# Altium PCB SB0037A.PcbDoc (part 1 of 7)
Units mil, origin at the board's own origin, x right, y up, seen from the top; angles counter-clockwise.
Board outline 2872.5 x 4560 mil, 6 copper layers (Top Layer, L2, L3, L4, L5, Bottom Layer), stack 30.268 mil thick; 282 components, 292 nets, 1320 pads, 687 vias.
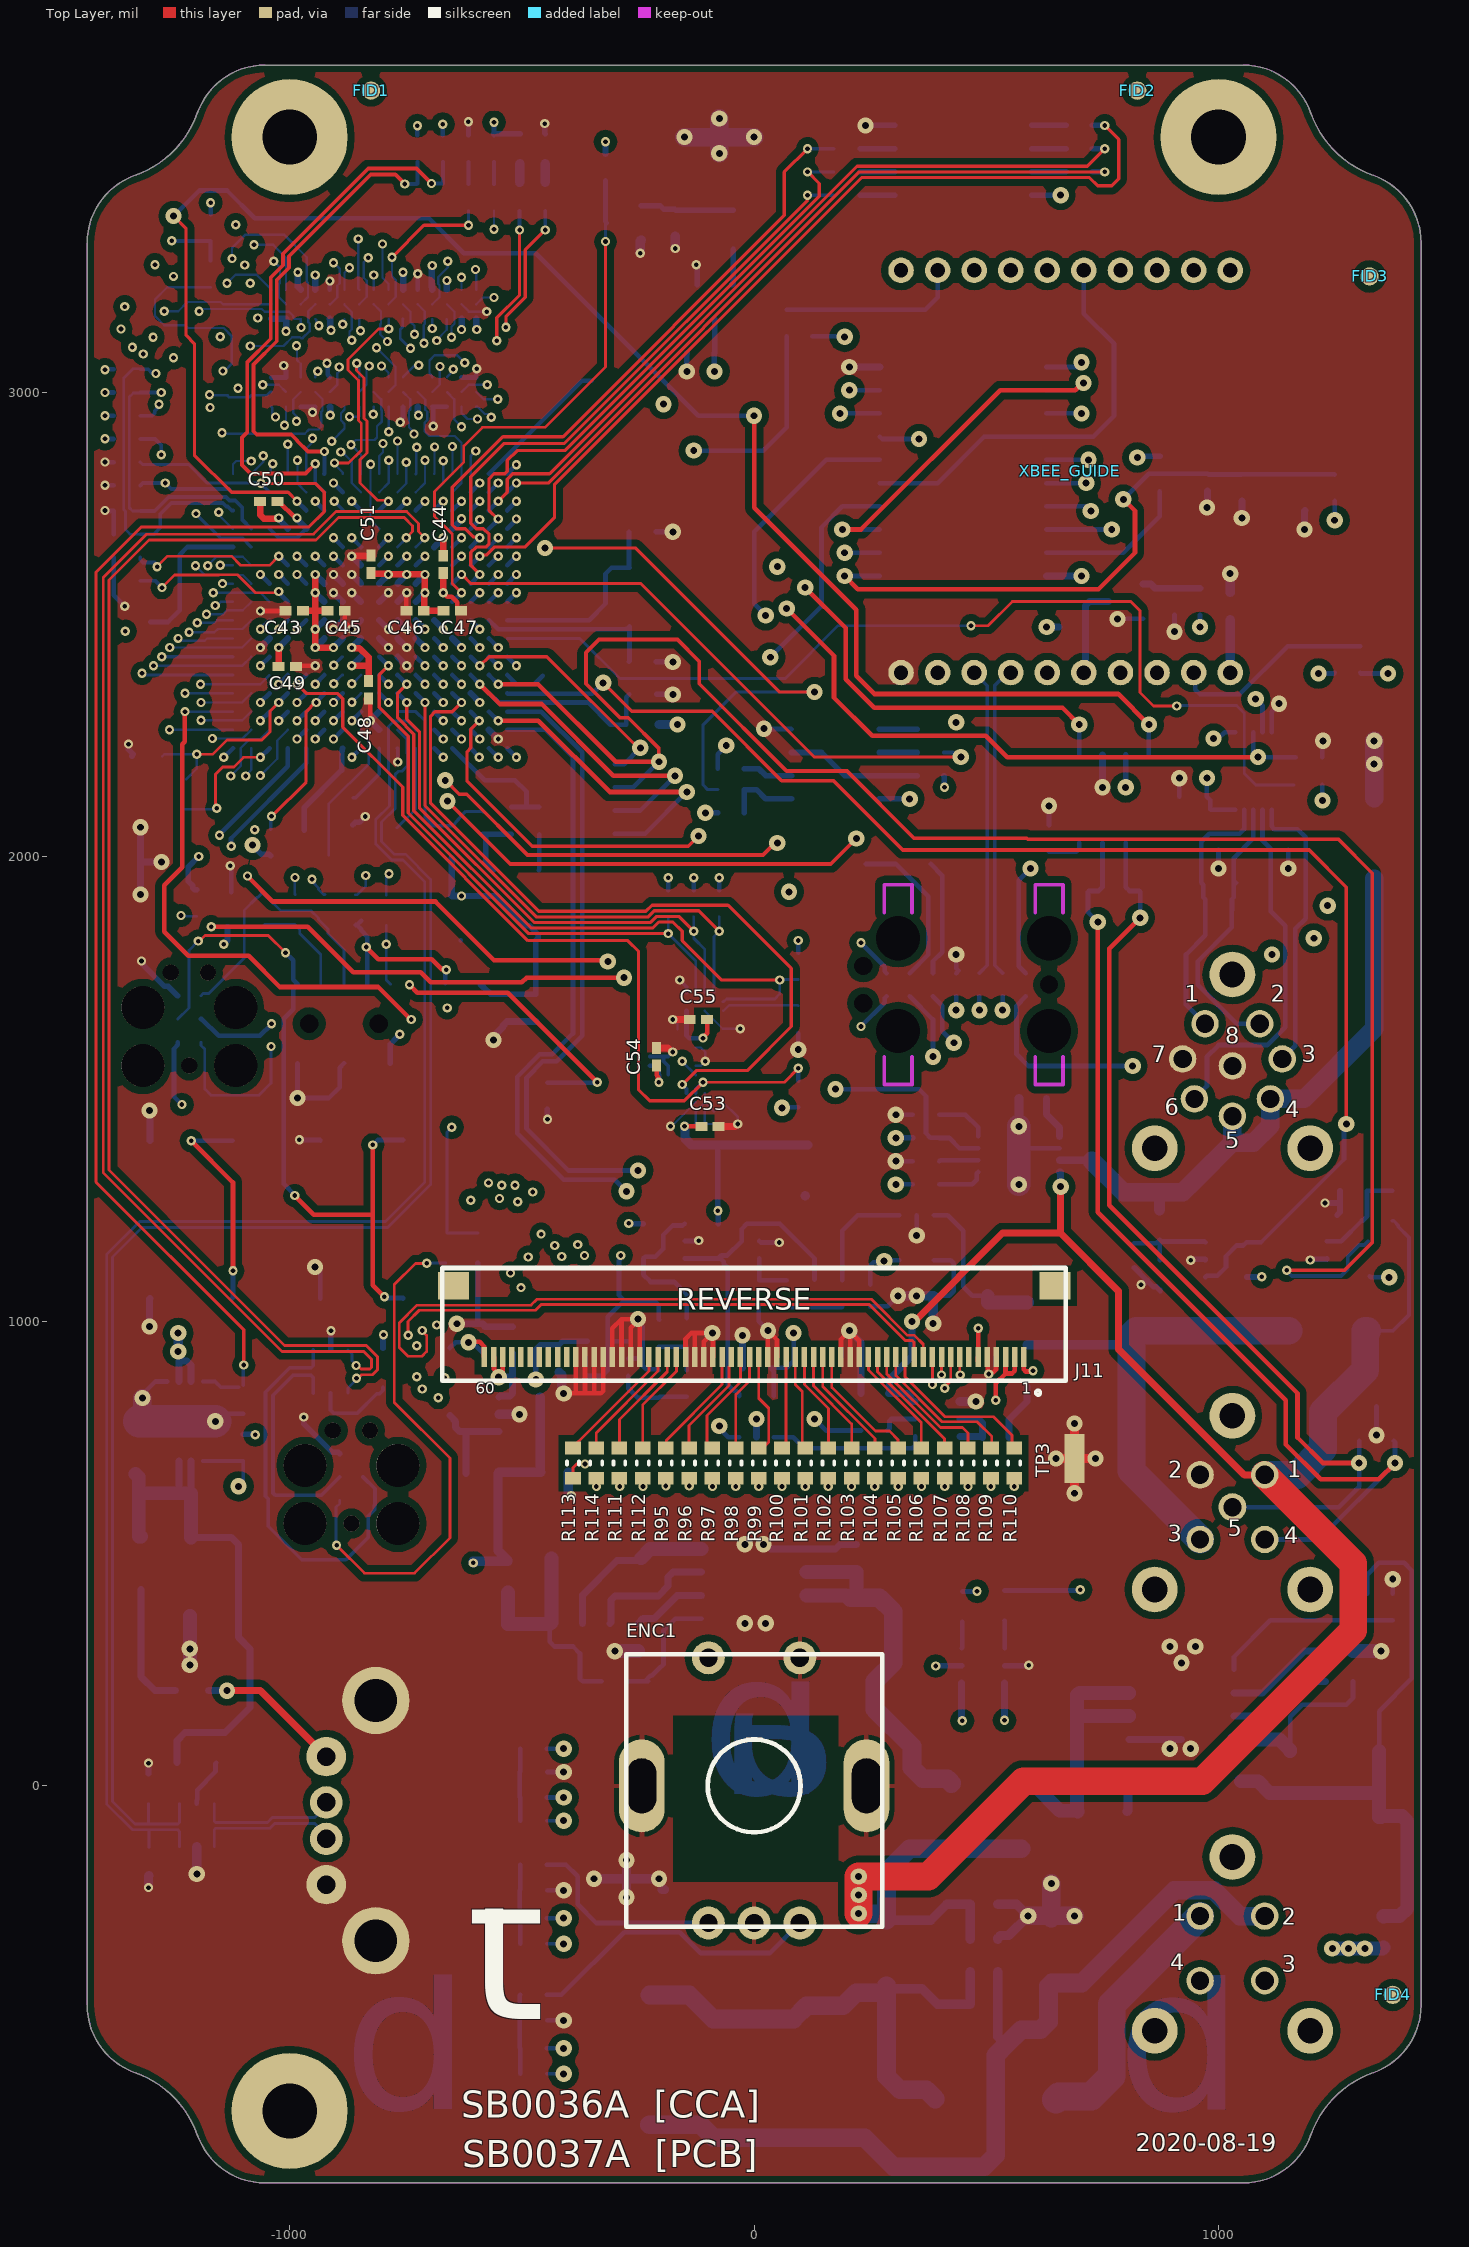
[diagram p0: Top Layer view]
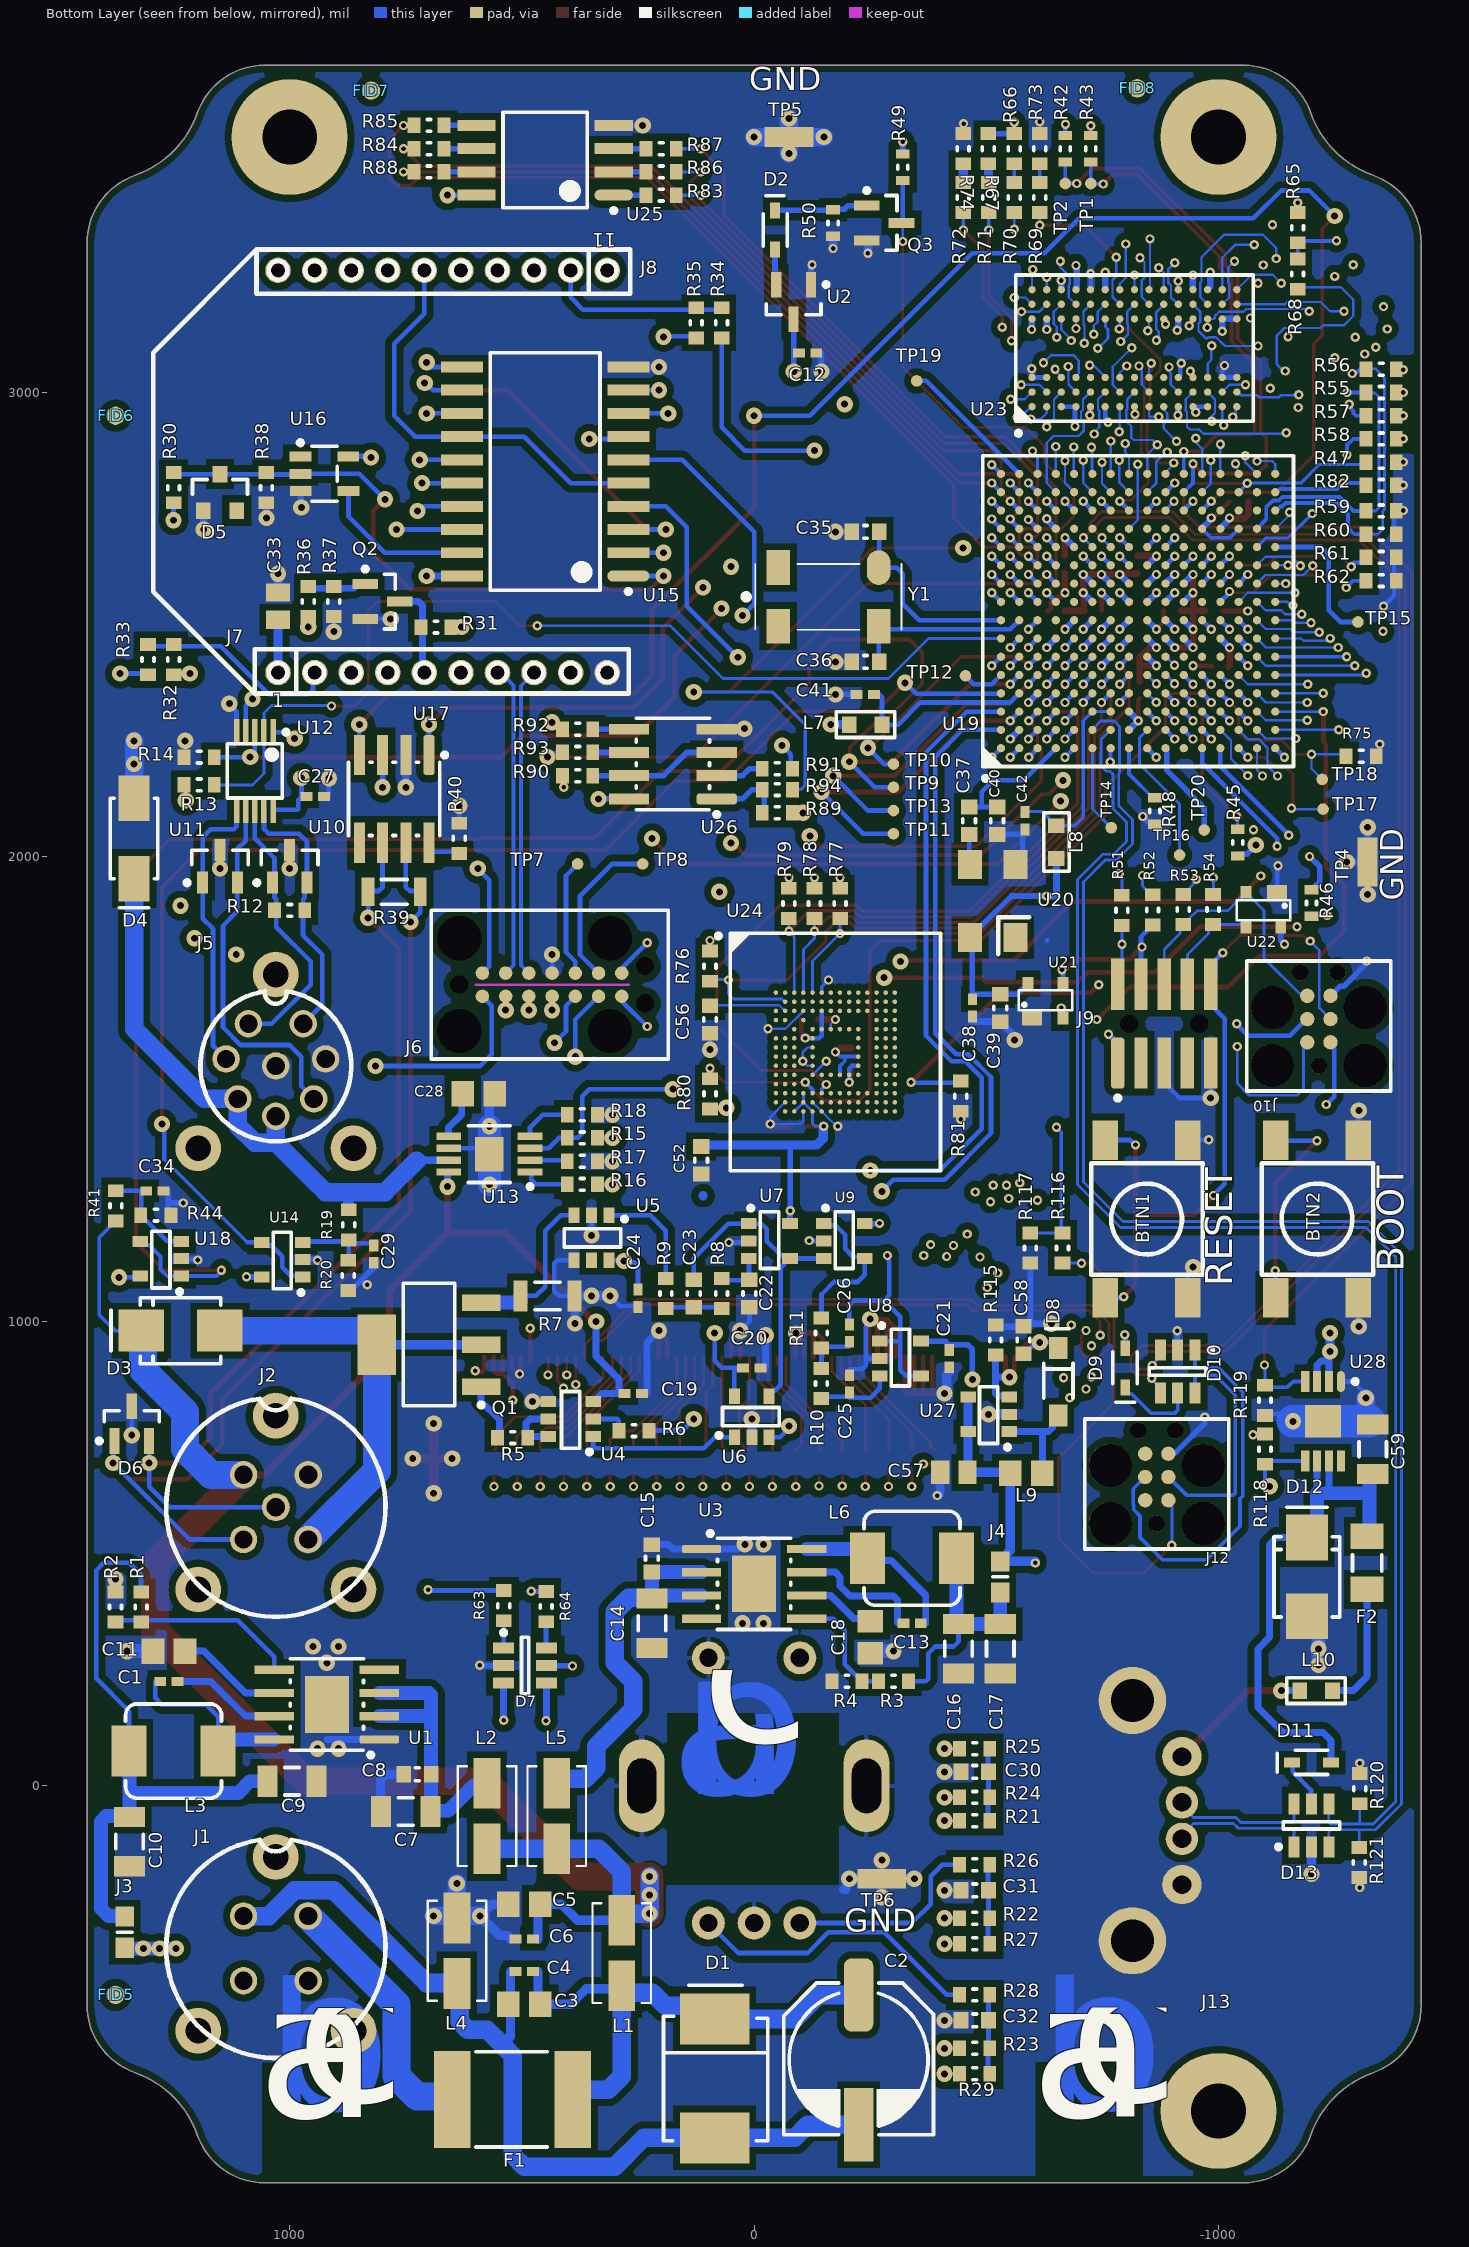
[diagram p1: Bottom Layer view, seen from below]
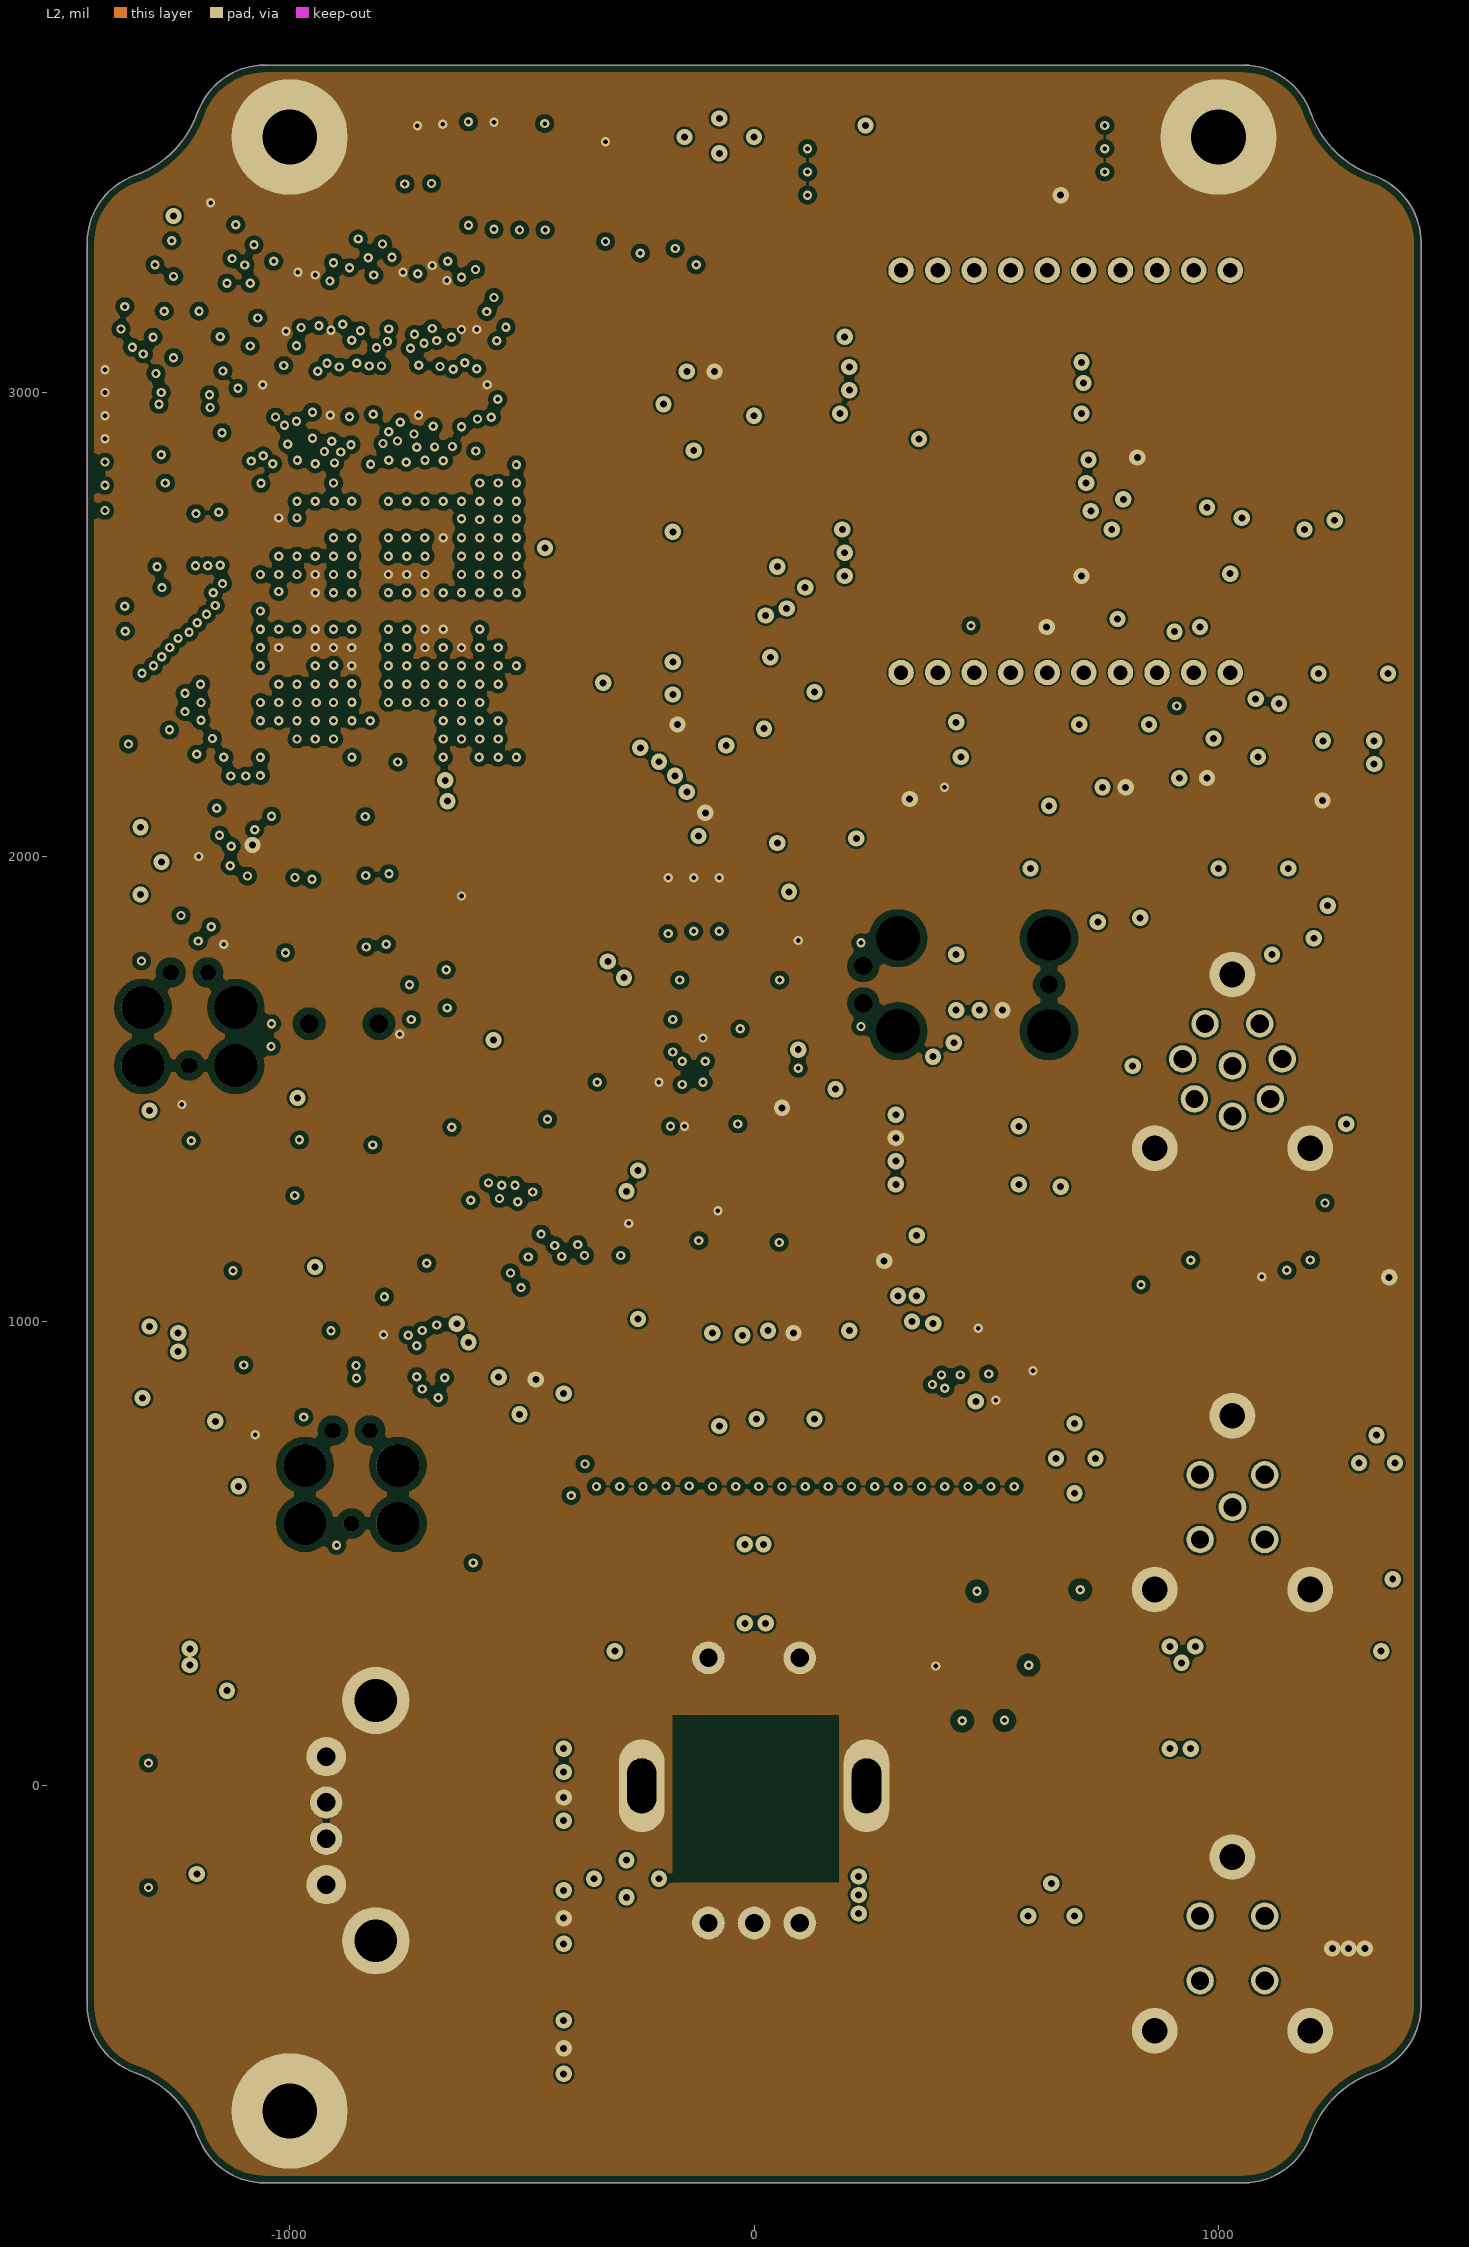
[diagram p2: L2]
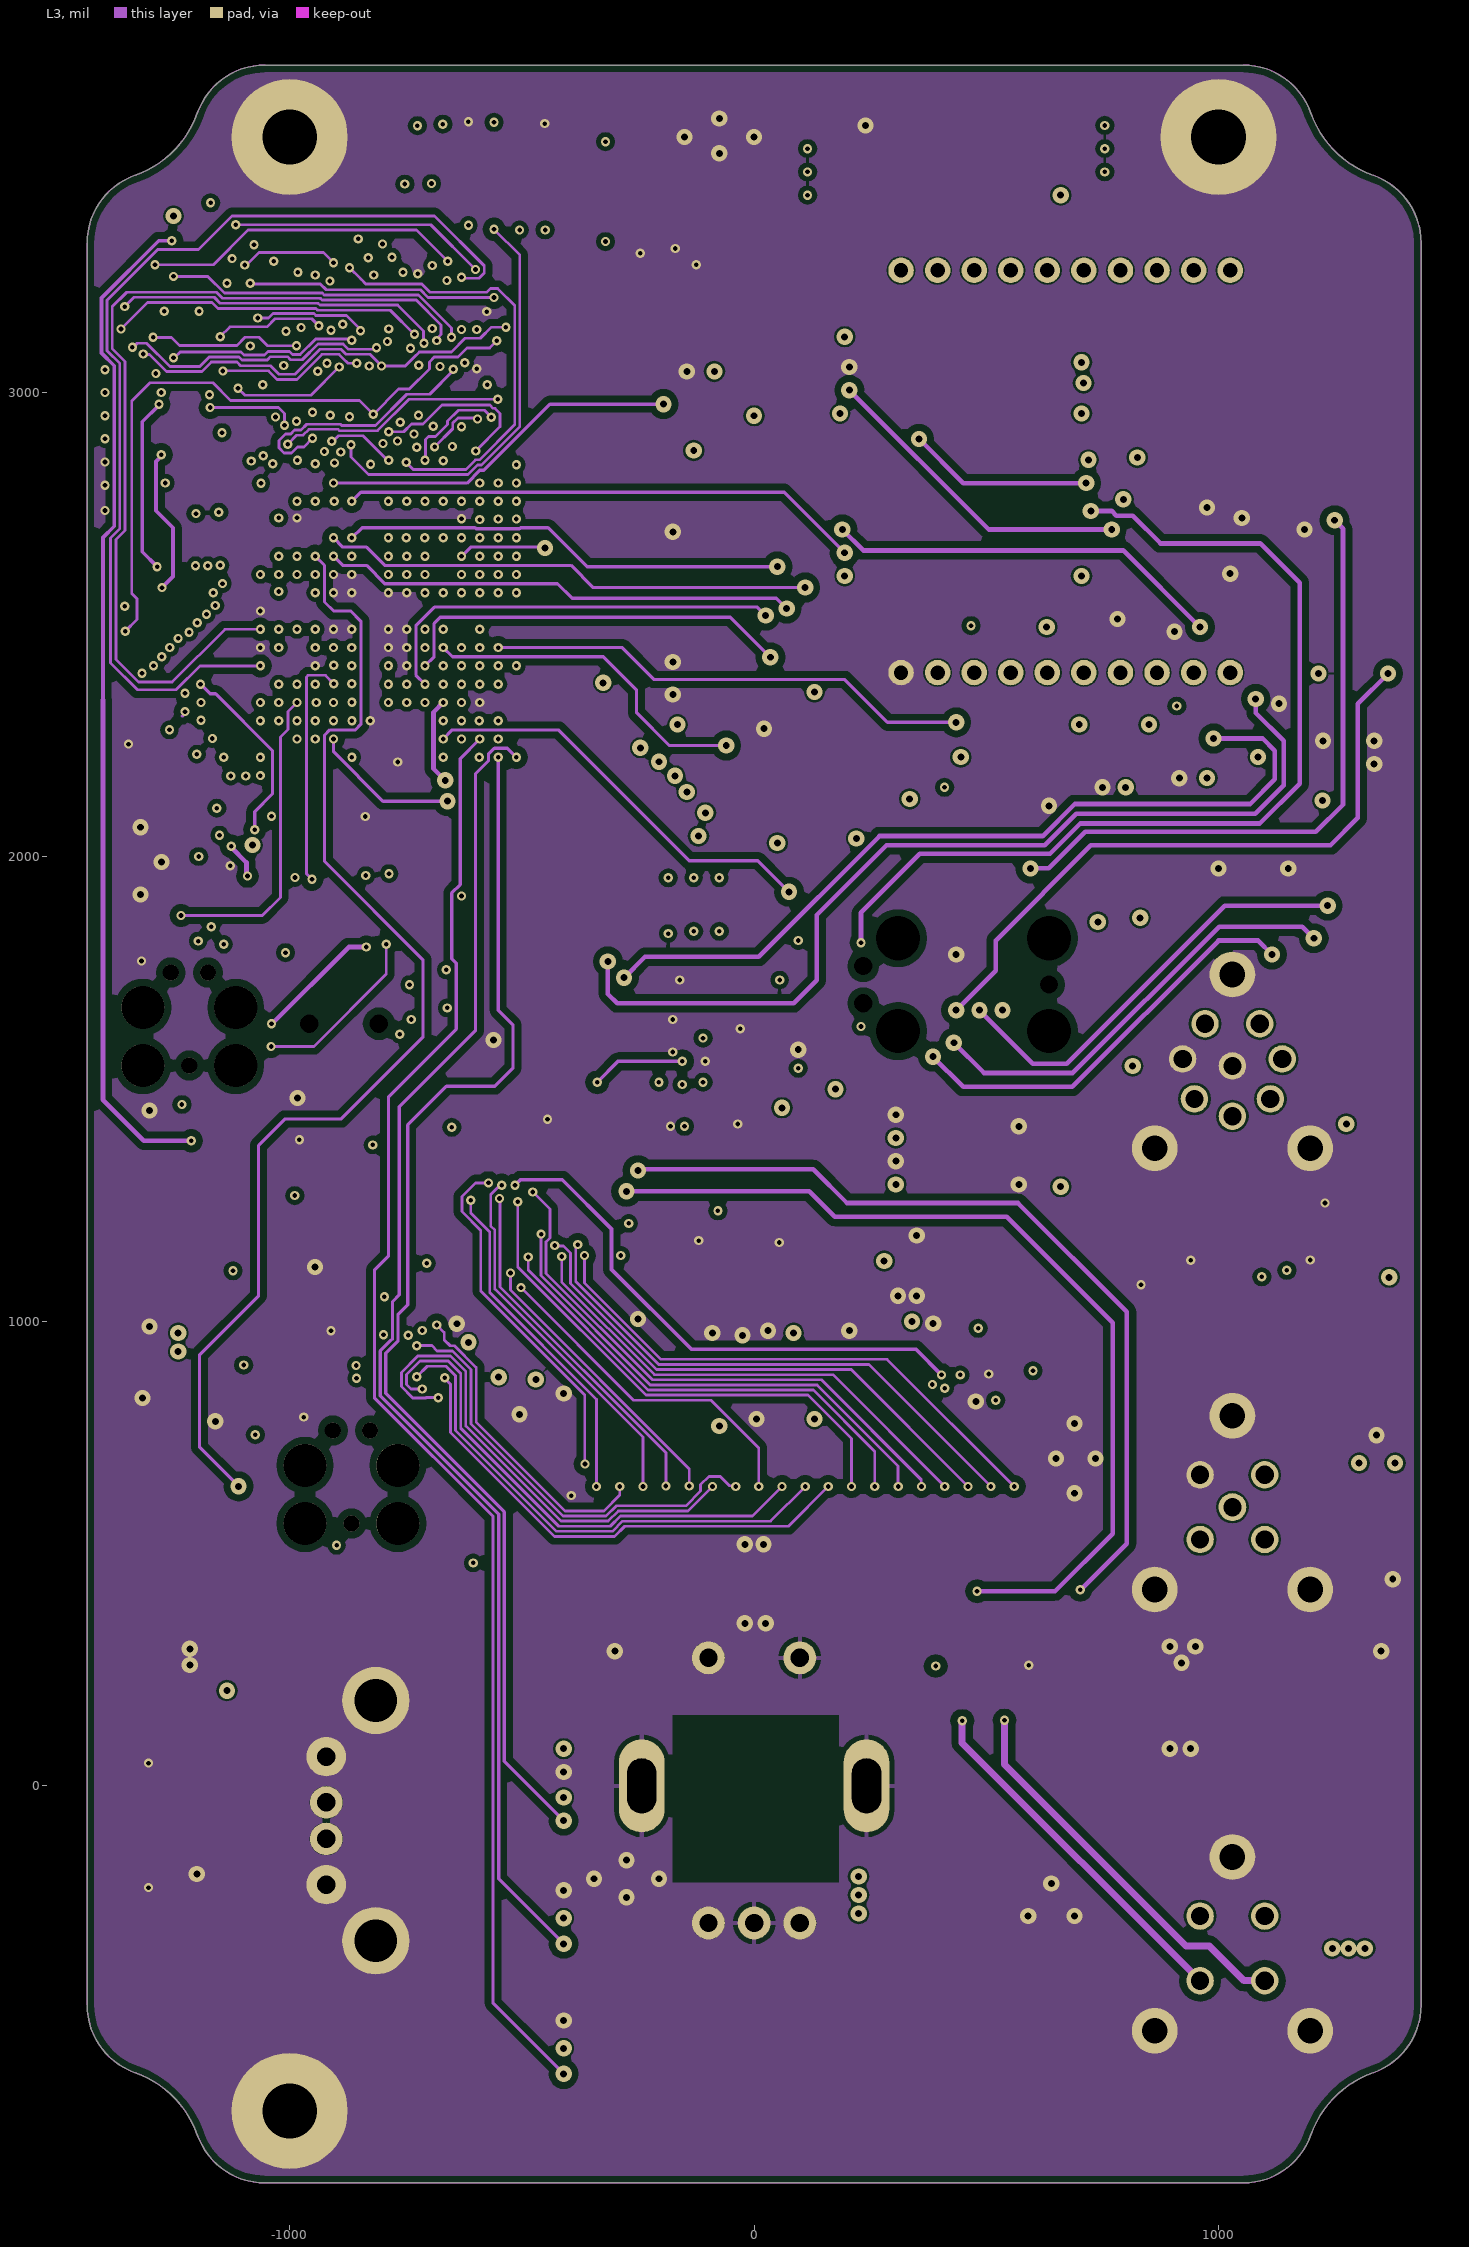
[diagram p3: L3]
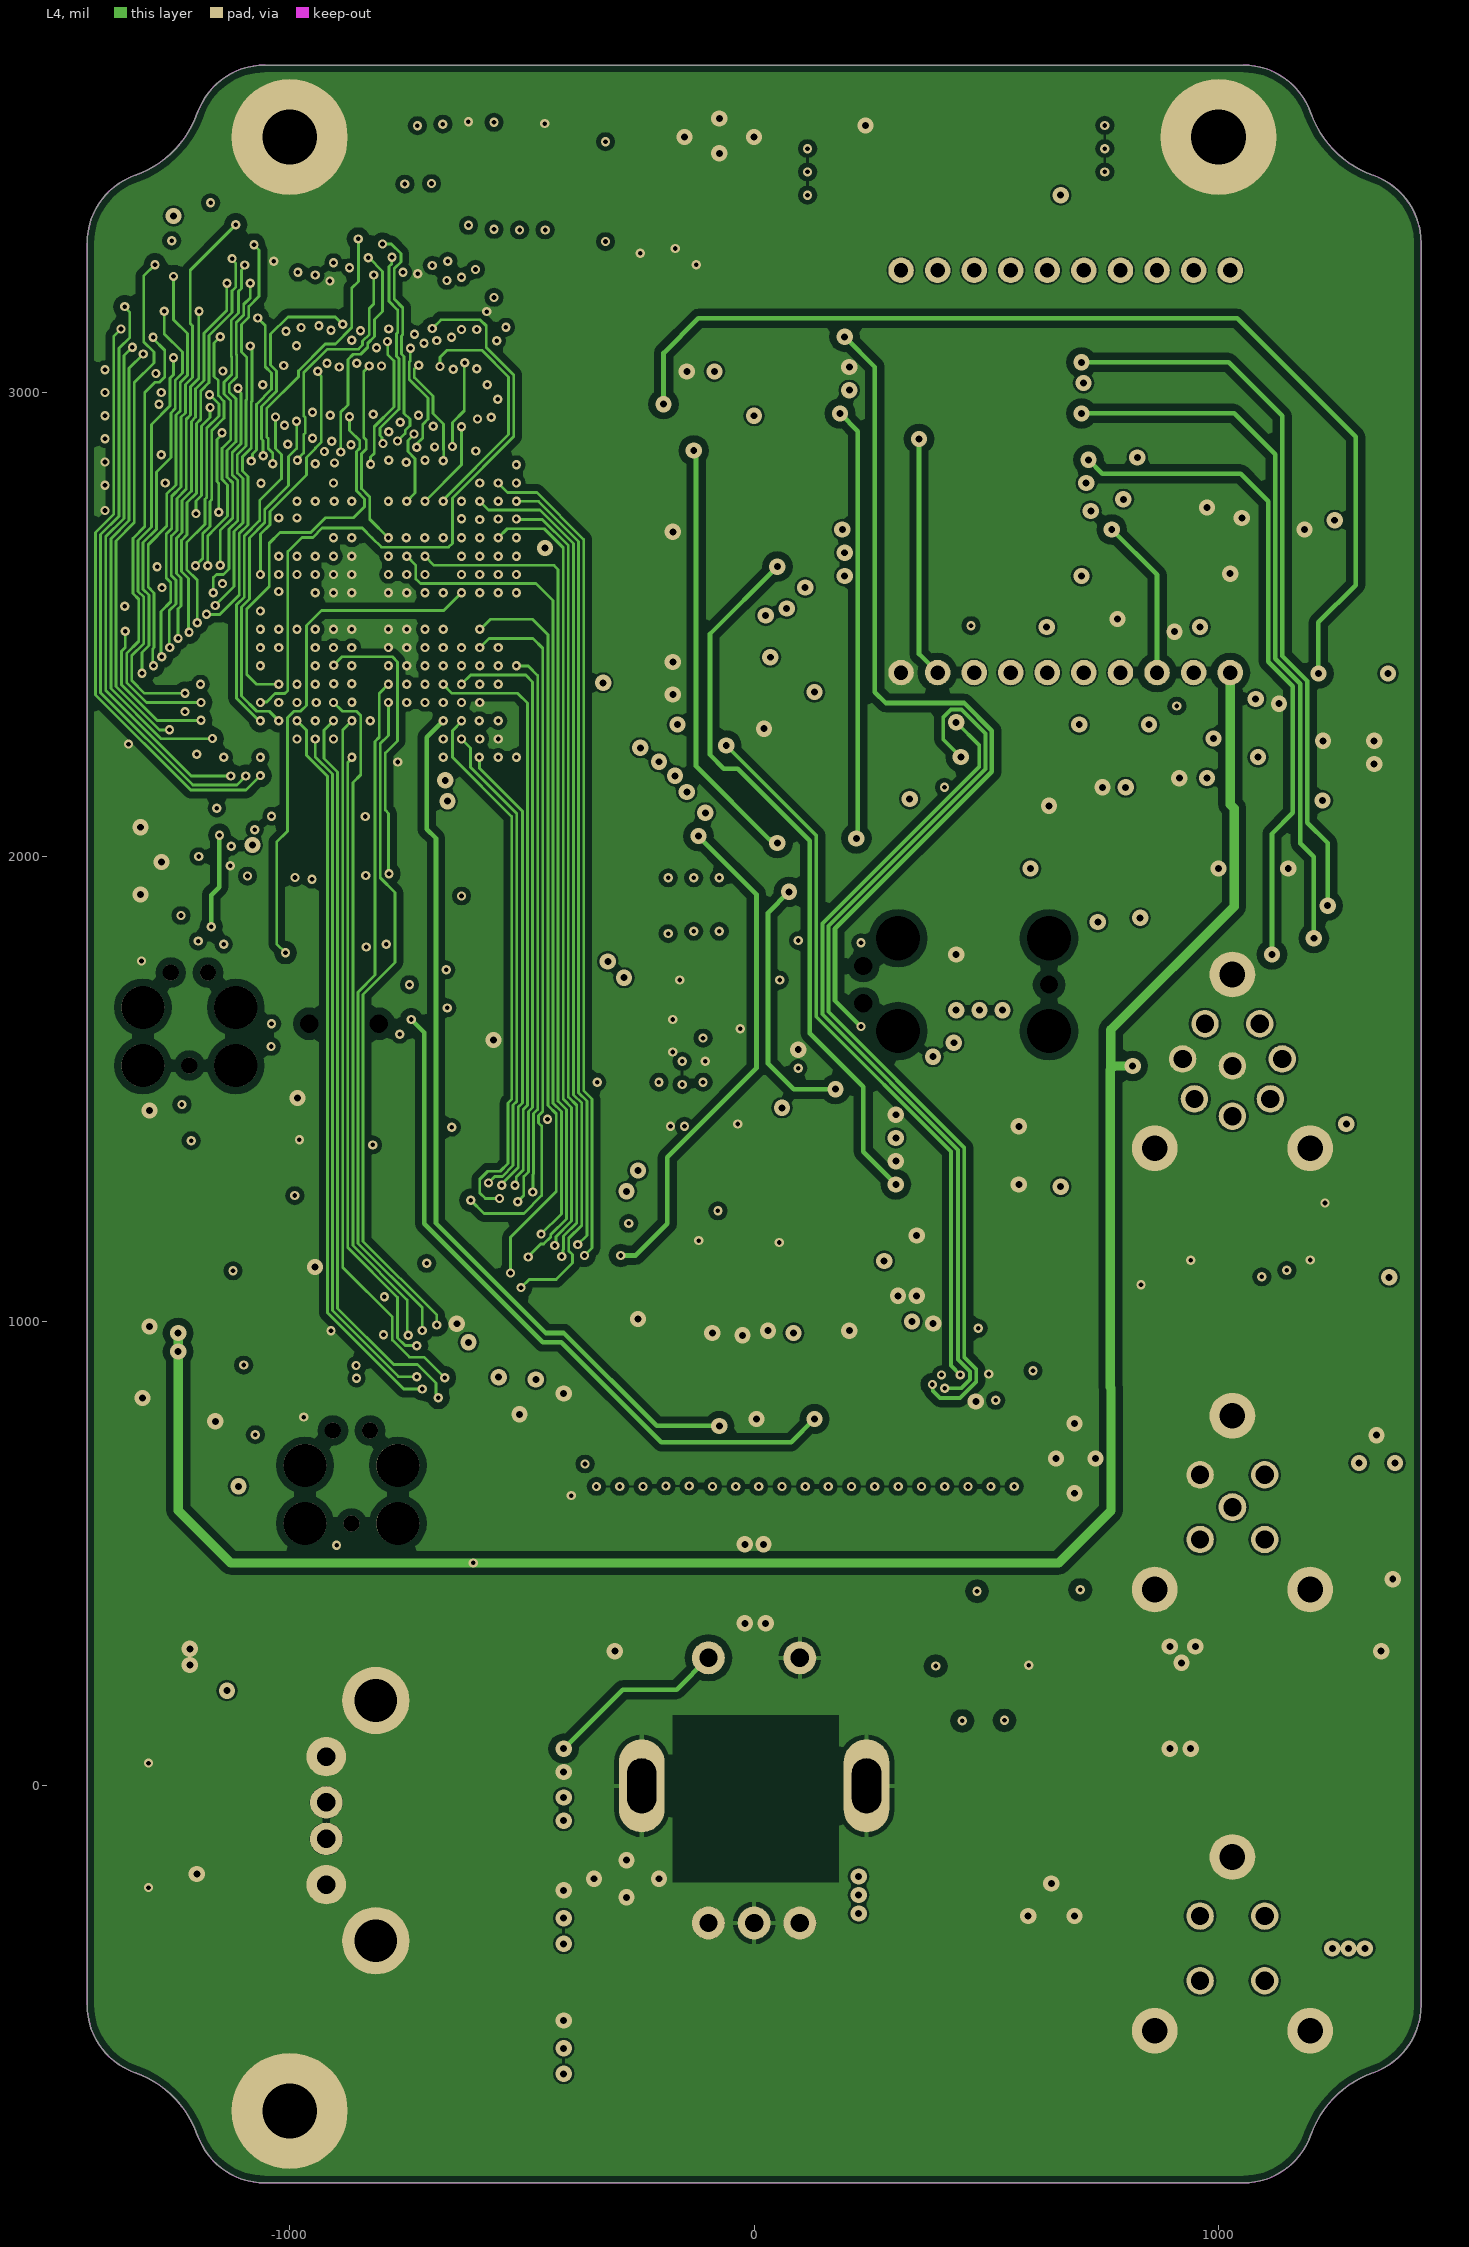
[diagram p4: L4]
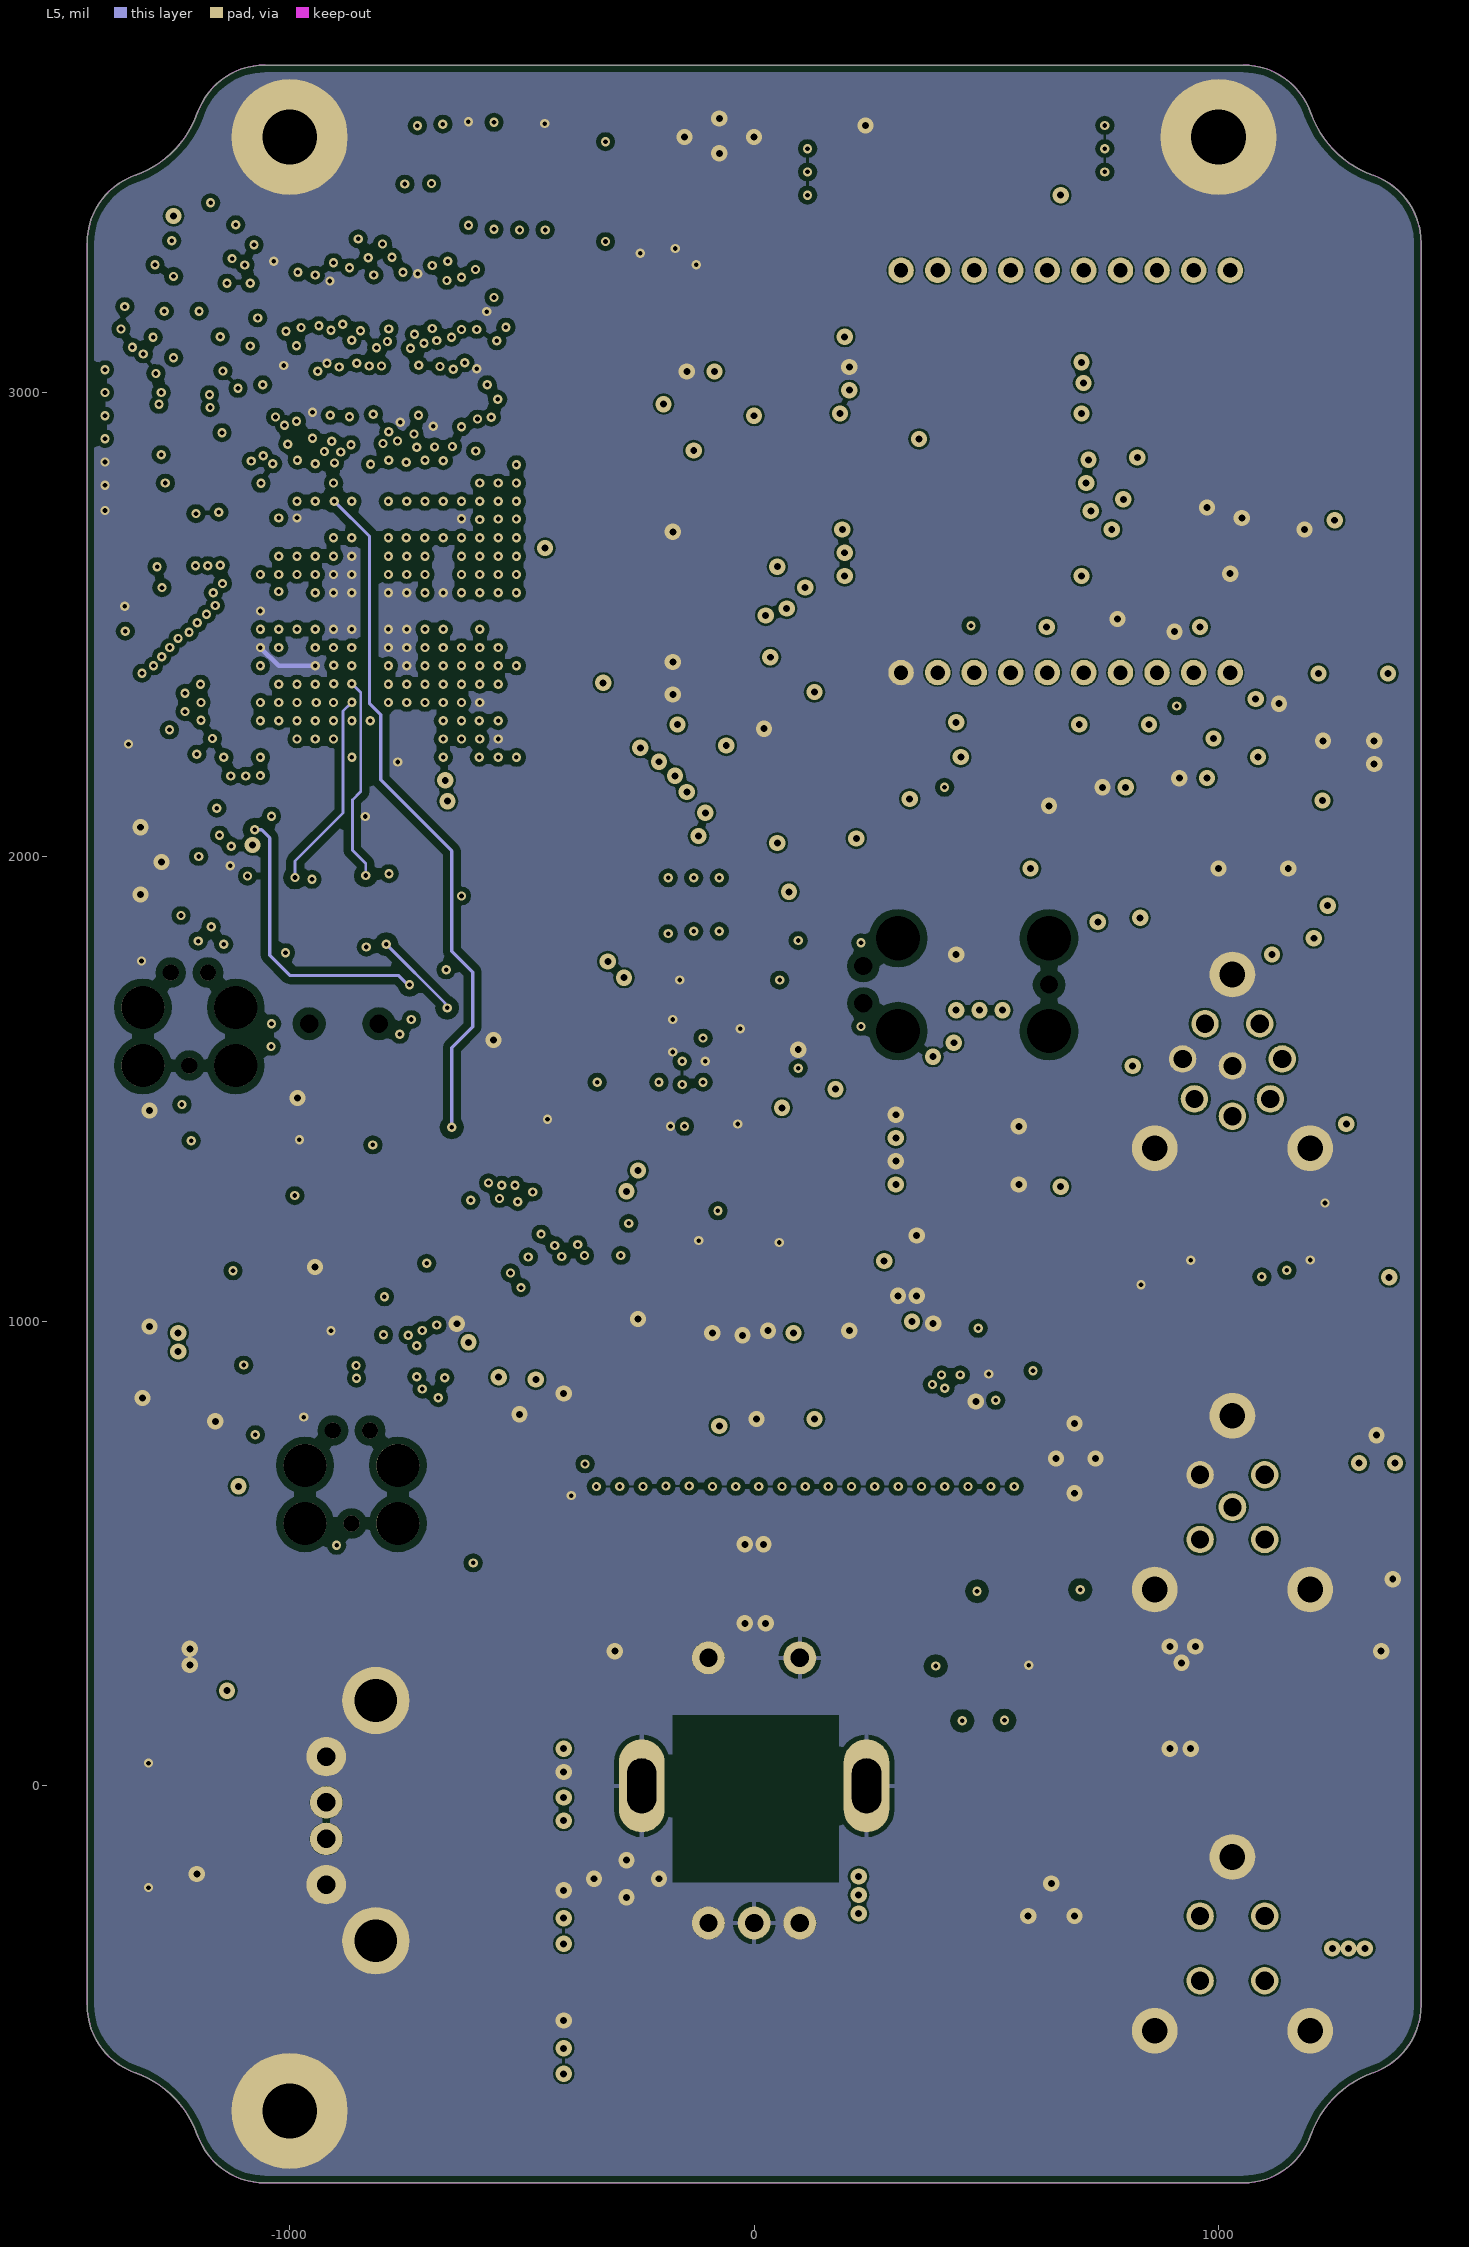
[diagram p5: L5]
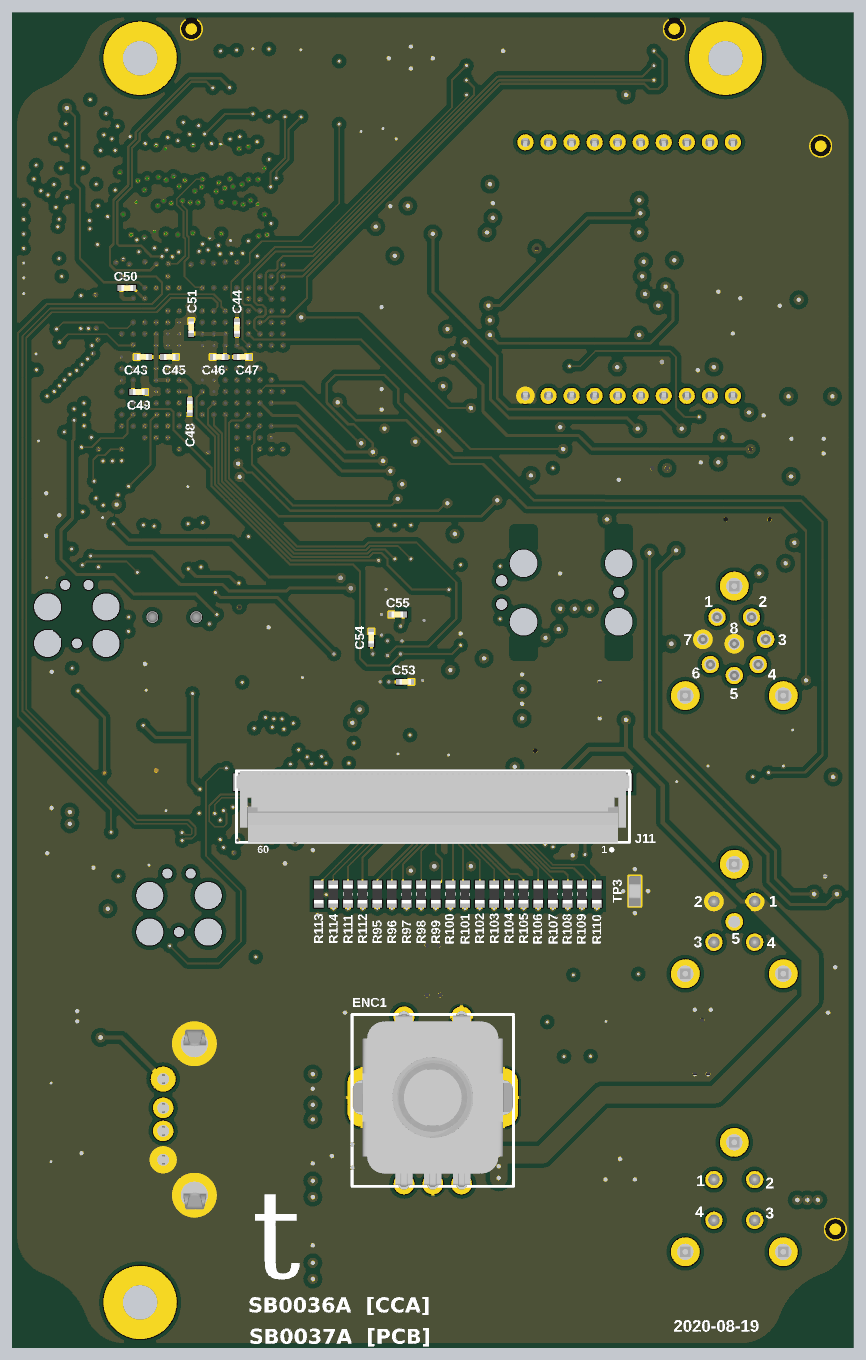
[diagram p10: 3D render of the assembled board from above, using the file's embedded part models]
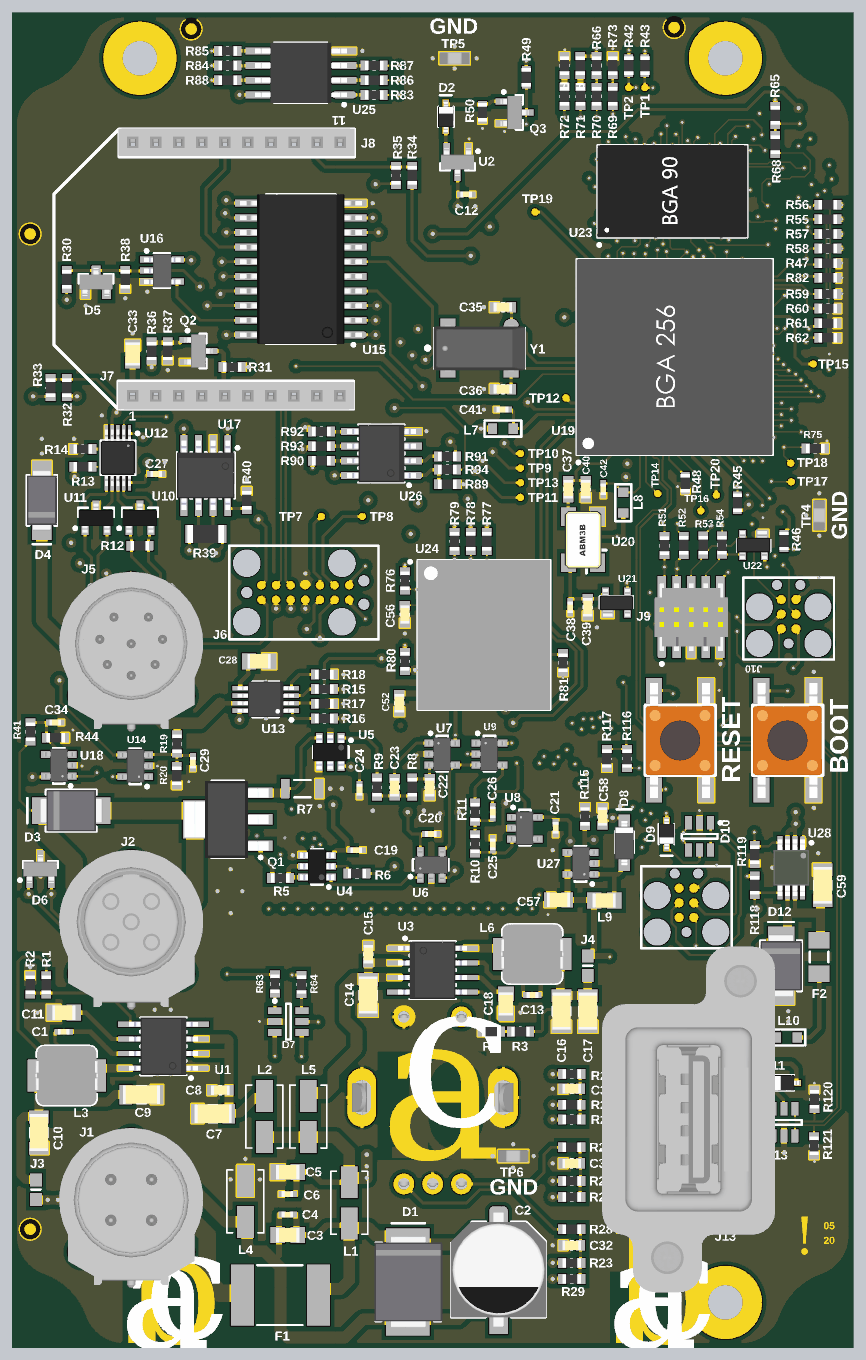
[diagram p11: 3D render of the assembled board from below, using the file's embedded part models]

## Layer stack, top to bottom
Top Solder: solder mask 0.4, Solder Resist, Dk 3.5
Top Layer: signal copper 1.378
PP1: prepreg 5, Dk 4.1
L2: signal copper 1.378
CORE1: core 4, Dk 4.1
L3: signal copper 1.378
PP3: prepreg 4, Dk 4.1
L4: signal copper 1.378
CORE2: core 4, Dk 4.1
L5: signal copper 1.378
PP2: prepreg 5, Dk 4.1
Bottom Layer: signal copper 1.378
Bottom Solder: solder mask 0.4, Solder Resist, Dk 3.5

## Board outline
-1198.83,-751.62 ccw(c-1052.7,-699.95) -1052.7,-854.95 1052.7,-854.95 ccw(c1052.7,-699.95) 1198.83,-751.62 cw(c1406.25,-824.95) 1332.92,-617.53 ccw(c1281.25,-471.4) 1436.25,-471.4 1436.25,3321.5 ccw(c1281.25,3321.5) 1332.92,3467.63 cw(c1406.25,3675.05) 1198.83,3601.72 ccw(c1052.7,3550.05) 1052.7,3705.05 -1052.7,3705.05 ccw(c-1052.7,3550.05) -1198.83,3601.72 cw(c-1406.25,3675.05) -1332.92,3467.63 ccw(c-1281.25,3321.5) -1436.25,3321.5 -1436.25,-471.4 ccw(c-1281.25,-471.4) -1332.92,-617.53 cw(c-1406.25,-824.95)

## Design rules (kind name [scope] priority, off if disabled: settings)
BoardOutlineClearance [All] p1: gap=15 ignorepadtopadclearanceinfootprint=FALSE
Clearance "RAM Clearance" [InNetClass('CLASS_RAM') vs InComponent('U18')] p1: gap=5 ignorepadtopadclearanceinfootprint=FALSE
Clearance Clearance_DIFF [InNetClass('DIFF90') vs Not OnLayer('Top Layer')] p2: gap=6 ignorepadtopadclearanceinfootprint=FALSE except(8: Arc-Track Arc-Via Track-Track SMDPad-Via THPad-Via; 30: Arc-Poly Track-Poly SMDPad-Poly THPad-Poly Via-Poly Fill-Poly Poly-Poly)
Clearance [All] p3: gap=6 ignorepadtopadclearanceinfootprint=FALSE except(5: Arc-Track Arc-SMDPad Track-Track Track-SMDPad SMDPad-SMDPad; 15: Arc-Poly Track-Poly SMDPad-Poly THPad-Poly Via-Poly Fill-Poly Poly-Poly)
Clearance Clearance_HV [InNet('+HV')] p4: gap=16 ignorepadtopadclearanceinfootprint=FALSE
ComponentClearance ComponentClearance_1 [IsVia vs IsText and OnBottomLayer] p1: gap=0 collisioncheckmode=3 verticalgap=0 showdistances=FALSE
ComponentClearance [All] p2: gap=0 collisioncheckmode=3 verticalgap=0 showdistances=FALSE
DiffPairsRouting [InDifferentialPairClass('DIFF90')] p1: maxlimit=10 minlimit=6.6 mostfreqgap=6.6 toplayer_minwidth=6 toplayer_maxwidth=6 toplayer_prefwidth=6 midlayer1_minwidth=6 midlayer1_maxwidth=6 midlayer1_prefwidth=6 midlayer2_minwidth=6 midlayer2_maxwidth=6 midlayer2_prefwidth=6 midlayer3_minwidth=6 midlayer3_maxwidth=6 midlayer3_prefwidth=6 midlayer4_minwidth=6 midlayer4_maxwidth=6 midlayer4_prefwidth=6 bottomlayer_minwidth=6 bottomlayer_maxwidth=6 bottomlayer_prefwidth=6 maxuncoupledlength=500
HoleSize [All] p1: absolutevalues=TRUE maxlimit=250 minlimit=10 maxpercent=80.000 minpercent=20.000
PlaneClearance [All] p1: clearance=8
PlaneConnect [All] p1: planeconnectstyle=Direct reliefexpansion=20 reliefentries=4 reliefconductorwidth=10 reliefairgap=10
PolygonConnect PolygonConnect_1 [HasFootprint('PEC11R-4215K-S0024')] p1: connectstyle=Relief reliefconductorwidth=10 reliefentries=4 polygonreliefangle="90 Angle" airgapwidth=10 // PEC11R-4215K-S0024
PolygonConnect [All] p2: connectstyle=Direct reliefconductorwidth=10 reliefentries=4 polygonreliefangle="90 Angle" airgapwidth=10
RoutingVias [All] p1: holewidth=10 width=20 viastyle="Through Hole" minholewidth=10 minwidth=20 maxholewidth=15 maxwidth=35
ShortCircuit ShortCircuit_2 [InNet('+3.3v') vs IsText and OnBottomLayer] p1: allowed=FALSE
ShortCircuit ShortCircuit_1 [InNet('GND') vs IsText and OnBottomLayer] p2: allowed=TRUE
ShortCircuit [All] p3: allowed=FALSE
SilkToSolderMaskClearance SilkscreenOverComponentPads [IsPad] p1: minsilkscreentomaskgap=10 clearancetoexposedcopper=TRUE
SolderMaskExpansion [All] p1: expansion=4 istentingtop=FALSE
SupplyNets "Schematic Supply Nets_3" [InNet('+3V3')] p1: voltage=0.000
SupplyNets "Schematic Supply Nets_2" [InNet('+12V_FILT')] p2: voltage=0.000
SupplyNets "Schematic Supply Nets_1" [InNet('+5V')] p3: voltage=0.000
SupplyNets "Schematic Supply Nets" [InNet('GND')] p4: voltage=0.000
Width "RAM WIDTH" [InNetClass('CLASS_RAM') or InComponent('U18')] p1: maxlimit=10 minlimit=5 preferedwidth=7 toplayer_minwidth=6 midlayer1_minwidth=6 midlayer2_minwidth=6 midlayer3_minwidth=10 midlayer3_prefwidth=10 midlayer4_minwidth=10 midlayer4_prefwidth=10 minimp=50.000000 maximp=50.000000 favimp=50.000000
Width [All] p2: maxlimit=200 minlimit=5 preferedwidth=8 toplayer_minwidth=6 midlayer1_minwidth=6 midlayer2_minwidth=6 midlayer3_minwidth=6 midlayer4_minwidth=6 minimp=50.000000 maximp=50.000000 favimp=50.000000
23 further rules are at their usual default settings.

## Classes and differential pairs
differential pair class DIFF90: EXT_USB_HOST_D MODEM_USB_D USB_DEV_D USB_DEVICE_D USB_HOST_D
net class CLASS_RAM: \EMC_CAS \EMC_DYCS0 \EMC_RAS \EMC_WE EMC_A0 EMC_A1 EMC_A2 EMC_A3 EMC_A4 EMC_A5 EMC_A6 EMC_A7 EMC_A8 EMC_A9 EMC_A10 EMC_A11 EMC_A13 EMC_A14 EMC_CKEOUT0 EMC_CLK0 EMC_D0 EMC_D1 EMC_D2 EMC_D3 EMC_D4 EMC_D5 EMC_D6 EMC_D7 EMC_D8 EMC_D9 EMC_D10 EMC_D11 EMC_D12 EMC_D13 EMC_D14 EMC_D15 EMC_D16 EMC_D17 EMC_D18 EMC_D19 EMC_D20 EMC_D21 EMC_D22 EMC_D23 EMC_D24 EMC_D25 EMC_D26 EMC_D27 EMC_D28 EMC_D29 EMC_D30 EMC_D31 EMC_DQMOUT0 EMC_DQMOUT1 EMC_DQMOUT2 EMC_DQMOUT3 NetU16_D14 NetU16_L13 NetU16_N15
component class U_SolenoidDrive: C19 C20 C21 C22 C23 C24 C25 C26 D3 Q1 R5 R6 R7 R8 R9 R10 R11 U4 U5 U6 U7 U8 U9
component class U_Cell: C33 D5 J6 J7 J8 Q2 R30 R31 R32 R33 R34 R35 R36 R37 R38 TP7 TP8 U15 U16 XBEE_GUIDE
component class U_USB: C59 D9 D10 D11 D12 D13 F2 J12 J13 L10 R116 R117 R118 R119 R120 R121 U28
component class "U_Flash Memory": C52 C53 C54 C55 C56 R75 R76 R77 R78 R79 R80 R81 R82 R83 R84 R85 R86 R87 R88 R89 R90 R91 R92 R93 R94 TP18 U24 U25 U26
component class "U_Microprocessor Power": BTN1 C34 C35 C36 C37 C38 C39 C40 C41 C42 C43 C44 C45 C46 C47 C48 C49 C50 C51 J9 J10 L7 L8 Q3 R41 R42 R43 R44 R45 R46 R47 R48 R49 R50 R51 R52 R53 R54 TP9 TP10 TP11 TP12 TP13 TP14 U18 U20 U21 U22 Y1
component class U_Microprocessor1: D7 R55 R56 R57 R58 R59 R60 R61 R62 R63 R64 TP15 TP16 TP17 U19
component class U_Encoder: C30 C31 C32 ENC1 R21 R22 R23 R24 R25 R26 R27 R28 R29
component class U_CAN: D6 R39 R40 U17
component class U_POWER: C1 C2 C3 C4 C5 C6 C7 C8 C9 C10 C11 C12 C13 C14 C15 C16 C17 C18 D1 D2 F1 J3 J4 L1 L2 L3 L4 L5 L6 R1 R2 R3 R4 TP3 TP4 TP5 TP6 U1 U2 U3
component class U_LCD_IO: C57 C58 D8 J11 L9 R95 R96 R97 R98 R99 R100 R101 R102 R103 R104 R105 R106 R107 R108 R109 R110 R111 R112 R113 R114 R115 TP19 TP20 U27
component class U_RAM: BTN2 R65 R66 R67 R68 R69 R70 R71 R72 R73 R74 U23
component class U_SensorInterface: C27 C28 C29 D4 J5 R12 R13 R14 R15 R16 R17 R18 R19 R20 U10 U11 U12 U13 U14
differential pair USB_DEV_D: +USB_DEV_D_P -USB_DEV_D_N
differential pair MODEM_USB_D: +MODEM_USB_D_P -MODEM_USB_D_N
differential pair EXT_USB_HOST_D: +EXT_USB_HOST_D_P -EXT_USB_HOST_D_N
differential pair USB_DEVICE_D: +USB_DEVICE_D_P -USB_DEVICE_D_N
differential pair USB_HOST_D: +USB_HOST_D_P -USB_HOST_D_N

## Components (designator, comment, footprint, x,y, rotation, side; value= is the part's Value field where it differs from the comment)
BTN1 "FSM4JSMATR" FSM4JSMA -845,1220.47 r180 bottom
BTN2 "FSM4JSMATR" FSM4JSMA -1212,1220.47 r180 bottom
C1 "0.1µF" C0402_0.55MM_HD 1260,225 r180 bottom
C2 "220µF" C_ALU_F -225,-590 r270 bottom
C3 "1µF" C0805_1.50MM_MD 495,-470 r180 bottom
C4 "0.1µF" C0402_0.55MM_HD 495,-400 r180 bottom
C5 "1µF" C0805_1.50MM_MD 495,-255 r180 bottom
C6 "0.1µF" C0402_0.55MM_HD 495,-330 r180 bottom
C7 "10µF" C1206_1.90MM_HD 750,-55 r180 bottom
C8 "0.22µF" C0603_0.90MM_HD 725,25 r180 bottom
C9 "22µF" C1206_1.60MM_HD 995,10 r0 bottom
C10 "22µF" C1206_1.60MM_HD 1345,-120 r90 bottom
C11 "1µF" C0805_1.50MM_MD 1260,290 r180 bottom
C12 "0.1µF" C0402_0.55MM_HD -115,3085 r180 bottom
C13 "0.1µF" C0402_0.55MM_HD -340,350 r0 bottom
C14 "10µF" C1206_1.90MM_HD 220,350 r90 bottom
C15 "0.22µF" C0603_0.90MM_HD 220,490 r270 bottom
C16 "22µF" C1206_1.60MM_HD -440,295 r90 bottom
C17 "22µF" C1206_1.60MM_HD -530,295 r90 bottom
C18 "1µF" C0805_1.50MM_MD -250,320 r90 bottom
C19 "0.1µF" C0402_0.55MM_HD 260,845 r180 bottom
C20 "0.1µF" C0402_0.55MM_HD 5,900 r180 bottom
C21 "0.1µF" C0402_0.55MM_HD -420,920 r270 bottom
C22 "10000pF" C0603_0.90MM_HD 10,1060 r90 bottom
C23 "10000pF" C0603_0.90MM_HD 130,1060 r270 bottom
C24 "0.1µF" C0402_0.55MM_HD 250,1050 r270 bottom
C25 "0.1µF" C0402_0.55MM_HD -205,865.46 r90 bottom
C26 "0.1µF" C0402_0.55MM_HD -205,975 r90 bottom
C27 "0.1µF" C0402_0.55MM_HD 945,2130 r0 bottom
C28 "1µF" C0805_1.50MM_MD 593,1490 r0 bottom
C29 "0.1µF" C0402_0.55MM_HD 819,1145 r90 bottom
C30 "10000pF" C0603_0.90MM_HD -475,30 r180 bottom
C31 "10000pF" C0603_0.90MM_HD -475,-225 r180 bottom
C32 "10000pF" C0603_0.90MM_HD -475,-505 r180 bottom
C33 "4.7µF" C0805_1.50MM_HD 1025,2540 r270 bottom
C34 "0.1µF" C0402_0.55MM_HD 1290,1281 r0 bottom
C35 "12pF" C0603_0.90MM_HD -240,2700 r180 bottom
C36 "12pF" C0603_0.90MM_HD -240,2420 r180 bottom
C37 "100pF" C0603_0.95MM_HD -463,2078 r90 bottom
C38 "0.1µF" C0402_0.55MM_HD -470,1675 r90 bottom
C39 "10000pF" C0603_0.90MM_HD -530,1675 r90 bottom
C40 "100pF" C0603_0.95MM_HD -523,2078 r270 bottom
C41 "0.1µF" C0402_0.55MM_HD -239.52,2350 r180 bottom
C42 "0.1µF" C0402_0.55MM_HD -583,2078 r90 bottom
C43 "0.1µF" C0402_0.55MM_HD -990,2530 r0 top
C44 "0.1µF" C0402_0.55MM_HD -669.29,2629.92 r90 top
C45 "0.1µF" C0402_0.55MM_HD -900,2530 r180 top
C46 "0.1µF" C0402_0.55MM_HD -730,2530 r0 top
C47 "0.1µF" C0402_0.55MM_HD -650,2530 r180 top
C48 "0.1µF" C0402_0.55MM_HD -830,2360 r90 top
C49 "0.1µF" C0402_0.55MM_HD -1005,2410 r180 top
C50 "0.1µF" C0402_0.55MM_HD -1045,2765 r180 top
C51 "0.1µF" C0402_0.55MM_HD -825,2630 r270 top
C52 "2.2µF" C0603_0.90MM_HD 114,1347 r90 bottom
C53 "0.1µF" C0402_0.55MM_HD -95,1420 r180 top
C54 "0.1µF" C0402_0.55MM_HD -210,1570 r270 top
C55 "0.1µF" C0402_0.55MM_HD -120,1650 r0 top
C56 "2.2µF" C0603_0.90MM_HD 95,1650 r90 bottom
C57 "4.7µF" C0805_1.50MM_HD -430,675 r180 bottom
C58 "0.22µF" C0603_0.90MM_HD -580,960 r270 bottom
C59 "22µF" C1206_1.60MM_HD -1332,725 r270 bottom
D1 "SMCJ15A" D_SMC_P 85,-630 r90 bottom
D2 "BAT54JFILM" SOD-323 -45,3350 r90 bottom
D3 "ES2G-13-F" D_SMB_P 1235,980 r0 bottom
D4 "B240A-13-F" D_SMA_P 1335,2040 r270 bottom
D5 "BZX84B3V3-7-F" D_SOT-23-3_P 1150,2785 r90 bottom
D6 "PESD1CAN,215" SOT23_MEDIUM 1340,780 r90 bottom
D7 "IP4234CZ6,125" SOT427_MEDIUM 493,259 r180 bottom
D8 "1N4148W-7-F" D_SOD-123_P -655,870 r90 bottom
D9 "BAT54JFILM" SOD-323 -799,900 r270 bottom
D10 "IP4234CZ6,125" SOT427_MEDIUM -912,892 r270 bottom
D11 "BAT54JFILM" SOD-323 -1200,50 r0 bottom
D12 "SMBJ5.0A" D_SMB_P -1190,450 r90 bottom
D13 "IP4234CZ6,125" SOT427_MEDIUM -1200,-85 r90 bottom
ENC1 "PEC11R-4215K-S0024" PEC11R-4215K-S0024 0,0 r0 top locked
F1 "15V 3A" F_PTC_2920 520,-675 r180 bottom
F2 "8V 1.1A" F_PTC_1206 -1320,480 r90 bottom
FID1 "PCB Fiducial" "Fiducial 1mm - 2mm" -825,3650 r0 top
FID2 "PCB Fiducial" "Fiducial 1mm - 2mm" 825,3650 r0 top
FID3 "PCB Fiducial" "Fiducial 1mm - 2mm" 1325,3250 r0 top
FID4 "PCB Fiducial" "Fiducial 1mm - 2mm" 1375,-450 r0 top
FID5 "PCB Fiducial" "Fiducial 1mm - 2mm" 1375,-450 r180 bottom
FID6 "PCB Fiducial" "Fiducial 1mm - 2mm" 1375,2950 r180 bottom
FID7 "PCB Fiducial" "Fiducial 1mm - 2mm" 825,3650 r180 bottom
FID8 "PCB Fiducial" "Fiducial 1mm - 2mm" -825,3655 r180 bottom
J1 "1437164" 1437164 1029.8,-349.93 r180 bottom locked
J2 "1551448" 1551448 1029.8,600.05 r180 bottom locked
J3 "5110" C0603_0.9mm 1355,-315 r270 bottom
J4 "5110" C0603_0.9mm -530,450 r90 bottom
J5 "1552269" 1552269 1029.8,1550.05 r180 bottom locked
J6 "Tag-Connect 2070 Pinout" TC2070 435,1725 r180 bottom
J7 "NPPN101BFCN-RC" NPPN101BFCN-RC 1025,2397 r180 bottom
J8 "NPPN101BFCN-RC" "NPPN101BFCN-RC - 11-20" 316.34,3263 r0 bottom
J9 "FTSH-105-01-F-DV-K-A" FTSH-105-01-F-DV-K-A -883,1641 r180 bottom
J10 "TC2030‐CTL‐NL" TC2030 -1376,1491 r90 bottom
J11 "XF2M-6015-1AH" "XF2M-6015-1AH - Reverse" 0,1000 r0 top locked
J12 "TC2030‐USB" TC2030 -1027,505 r90 bottom
J13 "MUSBRA511R0" AMPHENOL_MUSBR-A511 -814.49,-74.95 r270 bottom locked
L1 "36R@100MHz" T_Laird_35F0121-0SR-10 285,-360 r90 bottom
L2 "36R@100MHz" T_Laird_35F0121-0SR-10 575,-65 r90 bottom
L3 "2.2uH" IHLP-2020CZ 1250,75 r0 bottom
L4 "36R@100MHz" T_Laird_35F0121-0SR-10 640,-355 r90 bottom
L5 "36R@100MHz" T_Laird_35F0121-0SR-10 425,-65 r90 bottom
L6 "2.2uH" IHLP-2020CZ -340,490 r180 bottom
L7 "BLM18AG601SN1D" L_0603_0.8mm -240,2285 r0 bottom
L8 "BLM18AG601SN1D" L_0603_0.8mm -651,2032 r270 bottom
L9 "47µH 0.075A" L0805_1.45MM_MD -586,673 r180 bottom
L10 "BLM18AG601SN1D" L_0603_0.8mm -1210,205 r180 bottom
Q1 "ZXMN4A06GTA" SOT223 700,950 r0 bottom
Q2 "BSS138" SOT23_Medium 800,2550 r180 bottom
Q3 "BSS138" SOT23_Medium -280,3365 r180 bottom
R1 "100k" R0603_0.55MM_MD 1320,385 r90 bottom
R2 "43.2k" R0603_0.55MM_MD 1375,385 r270 bottom
R3 "100k" R0603_0.55MM_MD -300,225 r180 bottom
R4 "24.9k" R0603_0.55MM_MD -200,225 r180 bottom
R5 "0" R0603_0.55MM_MD 520,750 r180 bottom
R6 "1k" R0603_0.55MM_MD 258.54,765 r0 bottom
R7 "50mΩ" R1206_0.60MM_HD 445,1055 r0 bottom
R8 "1k" R0603_0.55MM_MD 70,1060 r90 bottom
R9 "1k" R0603_0.55MM_MD 190,1060 r270 bottom
R10 "10k" R0603_0.55MM_MD -145,866.46 r270 bottom
R11 "10k" R0603_0.55MM_MD -145,975 r270 bottom
R12 "100" R0603_0.55MM_MD 1000,1885 r0 bottom
R13 "1k" R0603_0.55MM_MD 1195,2155 r180 bottom
R14 "1k" R0603_0.55MM_MD 1195,2215 r0 bottom
R15 "10k" R0603_0.55MM_MD 370,1395 r180 bottom
R16 "4.7k" R0603_0.55MM_MD 370,1295 r0 bottom
R17 "4.7k" R0603_0.55MM_MD 370,1345 r0 bottom
R18 "3.92k" R0603_0.55MM_MD 370,1445 r0 bottom
R19 "10k" R0603_0.55MM_MD 873,1208 r90 bottom
R20 "1k" R0603_0.55MM_MD 874,1099 r270 bottom
R21 "10k" R0603_0.55MM_MD -475,-75 r180 bottom
R22 "10k" R0603_0.55MM_MD -475,-285 r0 bottom
R23 "10k" R0603_0.55MM_MD -475,-565 r0 bottom
R24 "10k" R0603_0.55MM_MD -475,-25 r0 bottom
R25 "100" R0603_0.55MM_MD -475,80 r180 bottom
R26 "100" R0603_0.55MM_MD -475,-170 r0 bottom
R27 "10k" R0603_0.55MM_MD -475,-340 r180 bottom
R28 "100" R0603_0.55MM_MD -475,-450 r0 bottom
R29 "10k" R0603_0.55MM_MD -475,-620 r180 bottom
R30 "1k" R0603_0.55MM_MD 1250,2795 r270 bottom
R31 "100k" R0603_0.55MM_MD 685,2495 r180 bottom
R32 "0" R0603_0.55MM_MD 1250,2425 r270 bottom
R33 "0" R0603_0.55MM_MD 1305,2425 r270 bottom
R34 "0" R0603_0.55MM_MD 70,3150 r90 bottom
R35 "0" R0603_0.55MM_MD 125,3150 r90 bottom
R36 "1k" R0603_0.55MM_MD 960,2550 r270 bottom
R37 "100k" R0603_0.55MM_MD 905,2550 r90 bottom
R38 "100k" R0603_0.55MM_MD 1050,2795 r90 bottom
R39 "120" R1206_0.70MM_HD 775,1925 r180 bottom
R40 "10k" R0603_0.55MM_MD 635,2040 r270 bottom
R41 "10k" R0603_0.55MM_MD 1374,1249 r270 bottom
R42 "10k" R0603_0.55MM_HD -670,3525 r270 bottom
R43 "10k" R0603_0.55MM_HD -725,3525 r270 bottom
R44 "1k" R0603_0.55MM_MD 1288,1229 r180 bottom
R45 "10k" R0603_0.55MM_HD -1041,2031 r270 bottom
R46 "10k" R0603_0.55MM_HD -1200,1901 r90 bottom
R47 "10k" R0603_0.55MM_MD -1350,2850 r180 bottom
R48 "12k" R0603_0.55MM_HD -863,2099 r270 bottom
R49 "10k" R0603_0.55MM_HD -320,3485 r90 bottom
R50 "10k" R0603_0.55MM_HD -170,3365 r90 bottom
R51 "2.2k" R0603_0.55MM_MD -792,1885 r90 bottom
R52 "2.2k" R0603_0.55MM_MD -858,1886 r90 bottom
R53 "2.2k" R0603_0.55MM_MD -924,1887 r90 bottom
R54 "2.2k" R0603_0.55MM_MD -988,1887 r90 bottom
R55 "100k" R0603_0.55MM_MD -1350,3000 r0 bottom
R56 "100k" R0603_0.55MM_MD -1350,3050 r0 bottom
R57 "100k" R0603_0.55MM_MD -1350,2950 r0 bottom
R58 "100k" R0603_0.55MM_MD -1350,2900 r0 bottom
R59 "0" R0603_0.55MM_MD -1350,2745 r180 bottom
R60 "0" R0603_0.55MM_MD -1350,2695 r180 bottom
R61 "0" R0603_0.55MM_MD -1350,2645 r180 bottom
R62 "0" R0603_0.55MM_MD -1350,2595 r180 bottom
R63 "1k" R0603_0.55MM_MD 539,388 r90 bottom
R64 "1k" R0603_0.55MM_MD 448,386 r90 bottom
R65 "1k" R0603_0.55MM_MD -1170,3355 r90 bottom
R66 "1k" R0603_0.55MM_MD -560,3525 r90 bottom
R67 "1k" R0603_0.55MM_MD -504,3525 r90 bottom
R68 "4.7k" R0603_0.55MM_MD -1170,3255 r270 bottom
R69 "4.7k" R0603_0.55MM_MD -615,3420 r270 bottom
R70 "4.7k" R0603_0.55MM_MD -560,3420 r270 bottom
R71 "4.7k" R0603_0.55MM_MD -505,3420 r270 bottom
R72 "4.7k" R0603_0.55MM_MD -450,3420 r270 bottom
R73 "1k" R0603_0.55MM_MD -615,3525 r270 bottom
R74 "1k" R0603_0.55MM_MD -450,3525 r270 bottom
R75 "10k" R0603_0.55MM_MD -1307,2217 r0 bottom
R76 "10k" R0603_0.55MM_MD 95,1765 r90 bottom
R77 "10k" R0603_0.55MM_MD -185,1900 r90 bottom
R78 "10k" R0603_0.55MM_MD -130,1900 r90 bottom
R79 "10k" R0603_0.55MM_MD -75,1900 r90 bottom
R80 "10k" R0603_0.55MM_MD 95,1490 r270 bottom
R81 "10k" R0603_0.55MM_MD -445,1485 r90 bottom
R82 "1k" R0603_0.55MM_MD -1350,2800 r0 bottom
R83 "33" R0603_0.55MM_MD 200,3425 r180 bottom
R84 "33" R0603_0.55MM_MD 700,3525 r0 bottom
R85 "33" R0603_0.55MM_MD 700,3575 r0 bottom
R86 "33" R0603_0.55MM_MD 200,3475 r180 bottom
R87 "33" R0603_0.55MM_MD 200,3525 r180 bottom
R88 "33" R0603_0.55MM_MD 700,3475 r0 bottom
R89 "10k" R0603_0.55MM_MD -50,2095 r0 bottom
R90 "10k" R0603_0.55MM_MD 380,2175 r0 bottom
R91 "33" R0603_0.55MM_MD -50,2190 r180 bottom
R92 "33" R0603_0.55MM_MD 380,2275 r0 bottom
R93 "33" R0603_0.55MM_MD 380,2225 r0 bottom
R94 "33" R0603_0.55MM_MD -50,2145 r180 bottom
R95 "51" R0603_0.55MM_MD -190,695 r270 top
R96 "51" R0603_0.55MM_MD -140,695 r270 top
R97 "51" R0603_0.55MM_MD -90,695 r270 top
R98 "51" R0603_0.55MM_MD -40,695 r270 top
R99 "51" R0603_0.55MM_MD 10,695 r270 top
R100 "51" R0603_0.55MM_MD 60,695 r270 top
R101 "51" R0603_0.55MM_MD 110,695 r270 top
R102 "51" R0603_0.55MM_MD 160,695 r270 top
R103 "51" R0603_0.55MM_MD 210,695 r270 top
R104 "51" R0603_0.55MM_MD 260,695 r270 top
R105 "51" R0603_0.55MM_MD 310,695 r270 top
R106 "51" R0603_0.55MM_MD 360,695 r270 top
R107 "51" R0603_0.55MM_MD 410,695 r270 top
R108 "51" R0603_0.55MM_MD 460,695 r270 top
R109 "51" R0603_0.55MM_MD 510,695 r270 top
R110 "51" R0603_0.55MM_MD 560,695 r270 top
R111 "51" R0603_0.55MM_MD -290,695 r270 top
R112 "51" R0603_0.55MM_MD -240,695 r270 top
R113 "51" R0603_0.55MM_MD -390,695 r270 top
R114 "51" R0603_0.55MM_MD -340,695 r270 top
R115 "15" R0603_0.55MM_MD -520,960 r270 bottom
R116 "1k" R0603_0.55MM_MD -664,1158 r90 bottom
R117 "2.2k" R0603_0.55MM_MD -595,1158 r90 bottom
R118 "10k" R0603_0.55MM_MD -1100,725 r90 bottom
R119 "10k" R0603_0.55MM_MD -1100,830 r90 bottom
R120 "15k" R0603_0.55MM_MD -1304,-6 r270 bottom
R121 "15k" R0603_0.55MM_MD -1303,-165 r90 bottom
TP1 "" TP_SMT_25_MIL_ROUND -725,3450 r270 bottom net-tie
TP2 "" TP_SMT_25_MIL_ROUND -670,3450 r270 bottom net-tie
TP3 "PC TEST POINT MINIATURE SMT" SMT_TEST_5015 690,705 r90 top
TP4 "PC TEST POINT MINIATURE SMT" SMT_TEST_5015 -1321,1989 r90 bottom
TP5 "PC TEST POINT MINIATURE SMT" SMT_TEST_5015 -75,3550 r180 bottom
TP6 "PC TEST POINT MINIATURE SMT" SMT_TEST_5015 -275,-200 r180 bottom
TP7 "" TP_SMT_25_MIL_ROUND 380,1985 r270 bottom net-tie
TP8 "" TP_SMT_25_MIL_ROUND 240,1985 r270 bottom net-tie
TP9 "" TP_SMT_25_MIL_ROUND -300,2150 r270 bottom net-tie
TP10 "" TP_SMT_25_MIL_ROUND -300,2200 r270 bottom net-tie
TP11 "" TP_SMT_25_MIL_ROUND -300,2050 r270 bottom net-tie
TP12 "" TP_SMT_25_MIL_ROUND -455,2390 r270 bottom net-tie
TP13 "" TP_SMT_25_MIL_ROUND -300,2100 r270 bottom net-tie
TP14 "" TP_SMT_25_MIL_ROUND -769,2063 r90 bottom net-tie
TP15 "" TP_SMT_25_MIL_ROUND -1300,2506 r90 bottom net-tie
TP16 "" TP_SMT_25_MIL_ROUND -916,2004 r90 bottom net-tie
TP17 "" TP_SMT_25_MIL_ROUND -1225,2103 r90 bottom net-tie
TP18 "" TP_SMT_25_MIL_ROUND -1223,2167 r90 bottom net-tie
TP19 "" TP_SMT_25_MIL_ROUND -350,3025 r180 bottom net-tie
TP20 "" TP_SMT_25_MIL_ROUND -969,2058 r0 bottom net-tie
U1 "LMR33630BDDAR" HSOIC-8 920,175 r0 bottom
U2 "MCP810T-270I/TT" SOT23_Medium -85,3195 r270 bottom
U3 "LMR33630BDDAR" HSOIC-8 0,435 r180 bottom
U4 "UCC27531DBVT" SOT95P245X145-6L 395,790 r0 bottom
U5 "LMP8640MK-T/NOPB" SOT95P245X145-6L 350,1180 r270 bottom
U6 "TLV3201AIDBVR" SOT23-5 5,795 r90 bottom
U7 "OPA322AIDBVT" SOT23-5 -33,1173 r180 bottom
U8 "OPA322AIDBVT" SOT23-5 -315,920 r180 bottom
U9 "OPA322AIDBVT" SOT23-5 -194,1173 r180 bottom
U10 "SM712.TCT" SOT-23 1000,1980 r90 bottom
U11 "SM712.TCT" SOT-23 1150,1980 r90 bottom
U12 "ISL3176EIUZ-T" "10 MSOP" 1075,2185 r270 bottom
U13 "TPS1H200AQDGNRQ1" TI_DGN_MD 570,1360 r0 bottom
U14 "OPA322AIDBVT" SOT23-5 1016,1133 r0 bottom
U15 "SN74HC244DWR" SOIC-20-300_MEDIUM 450,2830 r0 bottom
U16 "SN74AHC1G04DBVR" TSOT-23-5 925,2825 r180 bottom
U17 "SN65HVD230DR" SOIC-8 775,2125 r270 bottom
U18 "OPA322AIDBVT" SOT23-5 1277.29,1135 r0 bottom
U19 "LPC43S57JET256E" "LBGA256 16X16 1700X1700X155" -826.77,2529.53 r90 bottom
U20 "FOX924B-12.000" FOX924 -513.79,1905.26 r90 bottom
U21 "PRTR5V0U2X,215" SOT143B -598,1653 r180 bottom
U22 "PRTR5V0U2X,215" SOT143B -1126,1924 r0 bottom
U23 "IS42S32800J-6BLI" TFBGA90_8x13 -818.9,3095.47 r90 bottom
U24 "SDINBDG4-8G-I1" BGA_JDEC_EMMC_11.5x13.1x1.1_153PIN -175,1580 r180 bottom
U25 "W25Q128JVSIMTR" SOIC-8W 450,3500 r0 bottom
U26 "FM25CL64B-G" SOIC-8 175,2200 r0 bottom
U27 "CAT4238TD-GT3" SOT23-5 -505,800 r0 bottom
U28 "AP2111MPG-13" MSOP-8E -1225,785 r270 bottom
XBEE_GUIDE "XBEE3 Placement Guide" XBEE3_CELLULAR_PLACEMENT_GUIDE 680,2830 r90 top
Y1 "ECS-.327-12.5-17X-TR" ECX-306 -160,2560 r0 bottom

## Footprints (in the part's own frame and the unit in brackets; to place one, negate y for a bottom-side part, rotate by r counter-clockwise, add the part's x,y. Pads: shape width x height; smd on the part's side, far side on the other; paste and mask are expansions set on the pad)
"10 MSOP" [mm] "(Reference LTC DWG # 05-08-1661 Rev E)"
  rect 1.45x0.3 smd: 1(-2.125,1) 2(-2.125,0.5) 3(-2.125,0) 4(-2.125,-0.5) 5(-2.125,-1) 6(2.125,-1) 7(2.125,-0.5) 8(2.125,0) 9(2.125,0.5) 10(2.125,1)
  silkscreen extent -2.25,-1.5 1.48,1.82, body extent -2.45,-1.5 2.45,1.5, height 1.15
1437164 [mm] "CONN MALE INSERT 4POS GOLD SLDR"
  round 1.5 hole 1: 1(1.768,1.768) 2(-1.768,1.768) 3(-1.768,-1.768) 4(1.768,-1.768)
  round 2.5 hole 1.4: M(-4.25,-4.5) M(0,5) M(4.25,-4.5)
  silkscreen extent -6,-6 6,5.94, body extent -6.25,-7.6 6.25,6.25, height 21.31
1551448 [mm]
  round 1.5 hole 1: 1(-1.768,1.768) 2(1.768,1.768) 3(1.768,-1.768) 4(-1.768,-1.768)
  round 1.524 hole 1: 5(0,0)
  round 2.5 hole 1.4: M(-4.25,-4.5) M(0,5) M(4.25,-4.5)
  silkscreen extent -6,-6 6,5.94, body extent -6.25,-7.6 6.25,6.25, height 19.51
1552269 [mm] "CONN MALE INSERT 8POS GOLD SLDR"
  round 1.5 hole 1: 1(1.498,2.306) 2(-1.498,2.306) 3(-2.723,0.383) 4(-2.075,-1.804) 5(0,-2.75) 6(2.075,-1.804) 7(2.723,0.383) 8(0,0)
  round 2.5 hole 1.4: M(-4.25,-4.5) M(0,5) M(4.25,-4.5)
  silkscreen extent -4.12,-4.12 4.12,4.1, body extent -6.25,-7.6 6.25,6.25, height 21.31
AMPHENOL_MUSBR-A511 [mil] "AMPHENOL CONN RCPT USB2.0 TYPEA 4POS PCB"
  round 85 hole 40 mask+4: 1(-137.79,106.69) 4(137.8,106.69)
  round 70 hole 40 mask+4: 2(-39.37,106.69) 3(39.37,106.69)
  round 145 hole 92 mask+4: S1(-258.66,0) S2(258.66,0)
  body extent -591,-235 591,355, height 709
BGA_JDEC_EMMC_11.5x13.1x1.1_153PIN [mm] "eMMC JDEC 11.5 x 13.1 x 1.1 MM - 153-PIN"
  round 0.245 smd: A1(-3.25,3.25) A2(-2.75,3.25) A3(-2.25,3.25) A4(-1.75,3.25) A5(-1.25,3.25) A6(-0.75,3.25) A7(-0.25,3.25) A8(0.25,3.25) A9(0.75,3.25) A10(1.25,3.25) A11(1.75,3.25) A12(2.25,3.25) A13(2.75,3.25) A14(3.25,3.25) B2(-2.75,2.75) B3(-2.25,2.75) B4(-1.75,2.75) B5(-1.25,2.75) B6(-0.75,2.75) B7(-0.25,2.75) B8(0.25,2.75) B9(0.75,2.75) B10(1.25,2.75) B11(1.75,2.75) B12(2.25,2.75) B13(2.75,2.75) B14(3.25,2.75) C1(-3.25,2.25) C2(-2.75,2.25) C3(-2.25,2.25) C4(-1.75,2.25) C5(-1.25,2.25) C6(-0.75,2.25) C7(-0.25,2.25) C8(0.25,2.25) C9(0.75,2.25) C10(1.25,2.25) C11(1.75,2.25) C12(2.25,2.25) C13(2.75,2.25) C14(3.25,2.25) D1(-3.25,1.75) D2(-2.75,1.75) D4(-1.75,1.75) D12(2.25,1.75) D13(2.75,1.75) D14(3.25,1.75) E3(-2.25,1.25) E5(-1.25,1.25) E6(-0.75,1.25) E7(-0.25,1.25) E8(0.25,1.25) E9(0.75,1.25) E10(1.25,1.25) E12(2.25,1.25) E13(2.75,1.25) E14(3.25,1.25) F1(-3.25,0.75) F2(-2.75,0.75) F3(-2.25,0.75) F5(-1.25,0.75) F10(1.25,0.75) F12(2.25,0.75) F13(2.75,0.75) F14(3.25,0.75) G1(-3.25,0.25) G2(-2.75,0.25) G3(-2.25,0.25) G5(-1.25,0.25) G10(1.25,0.25) G12(2.25,0.25) G13(2.75,0.25) G14(3.25,0.25) H1(-3.25,-0.25) H2(-2.75,-0.25) H3(-2.25,-0.25) H5(-1.25,-0.25) H10(1.25,-0.25) H12(2.25,-0.25) H13(2.75,-0.25) H14(3.25,-0.25) J1(-3.25,-0.75) J2(-2.75,-0.75) J3(-2.25,-0.75) J5(-1.25,-0.75) J10(1.25,-0.75) J12(2.25,-0.75) J13(2.75,-0.75) J14(3.25,-0.75) K1(-3.25,-1.25) K2(-2.75,-1.25) K3(-2.25,-1.25) K5(-1.25,-1.25) K6(-0.75,-1.25) K7(-0.25,-1.25) K8(0.25,-1.25) K9(0.75,-1.25) K10(1.25,-1.25) K12(2.25,-1.25) K13(2.75,-1.25) K14(3.25,-1.25) L1(-3.25,-1.75) L2(-2.75,-1.75) L3(-2.25,-1.75) L12(2.25,-1.75) L13(2.75,-1.75) L14(3.25,-1.75) M1(-3.25,-2.25) M2(-2.75,-2.25) M3(-2.25,-2.25) M4(-1.75,-2.25) M5(-1.25,-2.25) M6(-0.75,-2.25) M7(-0.25,-2.25) M8(0.25,-2.25) M9(0.75,-2.25) M10(1.25,-2.25) M11(1.75,-2.25) M12(2.25,-2.25) M13(2.75,-2.25) M14(3.25,-2.25) N1(-3.25,-2.75) N2(-2.75,-2.75) N3(-2.25,-2.75) N4(-1.75,-2.75) N5(-1.25,-2.75) N6(-0.75,-2.75) N7(-0.25,-2.75) N8(0.25,-2.75) N9(0.75,-2.75) N10(1.25,-2.75) N11(1.75,-2.75) N12(2.25,-2.75) N13(2.75,-2.75) N14(3.25,-2.75) P2(-2.75,-3.25) P3(-2.25,-3.25) P4(-1.75,-3.25) P5(-1.25,-3.25) P6(-0.75,-3.25) P7(-0.25,-3.25) P8(0.25,-3.25) P9(0.75,-3.25) P10(1.25,-3.25) P11(1.75,-3.25) P12(2.25,-3.25) P13(2.75,-3.25) P14(3.25,-3.25)
  silkscreen extent -6.53,-6.5 5.75,6.5, body extent -5.75,-6.5 5.75,6.5, height 0.78
C0402_0.55MM_HD [mm] "Capacitor 0402 0.55mm Height- High Density"
  rect 0.65x0.5 smd: 1(-0.475,0) 2(0.475,0)
  body extent -0.52,-0.25 0.48,0.25, height 0.55
C0603_0.9mm [mm] "Chip Capacitor, Body 1.6x0.9mm, IPC High Density"
  rect 1.1x1 smd: 1(-0.85,0) 2(0.85,0)
  silkscreen extent 0,-0.4 0,0.4, body extent -0.8,-0.4 0.8,0.4, height 0.9
C0603_0.90MM_HD [mm] "Capacitor 0603 - High Density"
  rect 0.8x0.9 smd: 1(-0.75,0) 2(0.75,0)
  silkscreen extent -0.1,-0.35 0.1,0.35, body extent -0.8,-0.4 0.8,0.4, height 0.9
C0603_0.95MM_HD [mm] "Capacitor 0603 - High Density"
  rect 0.8x0.9 smd: 1(-0.75,0) 2(0.75,0)
  silkscreen extent -0.1,-0.35 0.1,0.35, body extent -0.8,-0.4 0.8,0.4, height 0.9
C0805_1.50MM_HD [mm] "Capacitor - 0805 - High Density"
  rect 1x1.3 smd: 1(-0.75,0) 2(0.75,0)
  body extent -1,-0.63 1,0.62, height 1.5
C0805_1.50MM_MD [mm] "Capacitor - 0805 - Medium Density"
  rect 1.25x1.4 smd: 1(-0.875,0) 2(0.875,0)
  body extent -1,-0.63 1,0.63, height 1.5
C1206_1.60MM_HD [mm] "Capacitor - 1206 - High Density"
  rect 1.1x1.7 smd: 1(-1.35,0) 2(1.35,0)
  silkscreen extent -0.4,-0.75 0.4,0.75, body extent -1.6,-0.8 1.6,0.8, height 1.6
C1206_1.90MM_HD [mm] "Capacitor - 1206 - High Density"
  rect 1.1x1.7 smd: 1(-1.35,0) 2(1.35,0)
  silkscreen extent -0.4,-0.75 0.4,0.75, body extent -1.6,-0.8 1.6,0.8, height 1.9
C_ALU_F [mm] "8.0mm x 10.2mm"
  rrect50% 4x1.6 smd: 1(-3.55,0)
  rect 4x1.6 smd: 2(3.55,0)
  silkscreen extent -4.2,-4.1 4.1,4.1, body extent -5,-4.15 4.9,4.15, height 10.22
D_SMA_P [mm] "SMA Diode - Polarized"
  rect 2.5x1.7 smd: 1(-2.2,0) 2(2.2,0)
  silkscreen extent -2.2,-1.3 3.8,1.3, body extent -2.6,-1.3 2.6,1.3, height 2.35
D_SMB_P [mm] "SMB Diode - Polarized"
  rect 2.5x2.3 smd: 1(-2.15,0) 2(2.15,0)
  silkscreen extent -2.2,-1.8 3.8,1.8, body extent -2.7,-1.8 2.7,1.8, height 2.3
D_SMC_P [mm] "Diode SMC - Polarized"
  rect 2.8x3.8 smd: 1(-3.25,0) 2(3.25,0)
  silkscreen extent -3.4,-2.9 5.1,2.8, body extent -3.97,-3 3.98,2.9, height 2.3
D_SOD-123_P [mm] "SOD-123 Diode - Polarized"
  rect 1.2x1 smd: 1(-1.85,0) 2(1.85,0)
  silkscreen extent -0.9,-0.8 2.9,0.8, body extent -1.95,-0.85 1.9,0.85, height 1.43
D_SOT-23-3_P [mm] "Diode - SOT-23-3 - Polarized"
  rect 0.9x0.8 smd: 1(-1,0.915) 2(-1,-0.915) 3(1,0)
  silkscreen extent -0.1,-1.5 0.7,1.5, body extent -1.2,-1.45 1.22,1.45, height 0.98
ECX-306 [mm]
  oval 1.3x1.9 smd: 1(-2.75,-1.6)
  rect 1.3x1.9 smd: 2(2.75,-1.6) 3(2.75,1.6) 4(-2.75,1.6)
  silkscreen extent -4,-1.8 4.63,1.8, body extent -3.99,-1.98 3.99,2.02, height 2.65
F_PTC_1206 [mm] "Fuse PTC - 1206"
  rect 1.4x1.8 smd: 1(-1.45,0) 2(1.45,0)
  silkscreen extent -0.45,-0.8 0.45,0.8, body extent -1.6,-0.8 1.6,0.8, height 0.6
F_PTC_2920 [mm] "LittleFuse 2920 SMT Fuse"
  rect 2x5.3 smd: 1(-3.3,0) 2(3.3,0)
  silkscreen extent -2,-2.6 1.9,2.6, body extent -4,-2.6 4,2.6, height 1.25
"Fiducial 1mm - 2mm" [mm] "1mm Pad 2mm Opening"
  round 1 smd paste-10 mask+0.5: 1(0,0)
FOX924 [mm] "Fox 924 Series Oscillator"
  rect 1.6x1.3 smd: 1(-2,-1.25) 2(2,-1.25) 3(2,1.25) 4(-2,1.25)
  silkscreen extent -2.9,-2 -0.9,-0.3, body extent -2.5,-1.6 2.5,1.6, height 1.1
FSM4JSMA [mil] "SWITCH TACTILE SPST-NO 0.05A 12V"
  rect 55x85 smd: A(-89,-170) A(-89,170) B(89,-170) B(89,170)
  silkscreen extent -119,-120 121,120, body extent -118,-198 118,196, height 200
FTSH-105-01-F-DV-K-A [mil] "Samtec FTSH-105-01-F-DV-K-A SMT Connector"
  rrect50% 29x110 smd: 1(-100,-85)
  rect 29x110 smd: 2(-100,85) 3(-50,-85) 4(-50,85) 5(0,-85) 6(0,85) 7(50,-85) 8(50,85) 9(100,-85) 10(100,85)
  round 5 hole 40 unplated mask+20: A(-75,0) A(75,0)
  silkscreen extent -105,-165 -95,-155, body extent -125,-115 125,115, height 241
HSOIC-8 [mm] "HSOIC, 8-Leads with Heat Pad, Body 5.0x4.0mm (max), Pitch 1.27mm, IPC Medium Density"
  rrect50% 2.15x0.45 smd: 1(-2.875,1.905)
  rect 2.15x0.45 smd: 2(-2.875,0.635) 3(-2.875,-0.635) 4(-2.875,-1.905) 5(2.875,-1.905) 6(2.875,-0.635) 7(2.875,0.635) 8(2.875,1.905)
  rect 2.13x3 on Bottom Solder paste+0 mask+0: 5(0,0)
  rect 2.4x3.1 smd paste+0 mask+0: 9(0,0)
  silkscreen extent -2.52,-2.5 2,2.88, body extent -3.01,-2.5 3,2.5, height 1.75
IHLP-2020CZ [mil] "Vishay IHLP 2020CZ Series"
  rect 75x110 smd: 1(-96,0) 2(96,0)
  silkscreen extent -103,-101 103,101, body extent -107,-101 107,101, height 113
L0805_1.45MM_MD [mm] "Inductor - 0805 - Medium Density"
  rect 1.25x1.4 smd: 1(-0.875,0) 2(0.875,0)
  body extent -1,-0.62 1,0.63, height 1.45
L_0603_0.8mm [mm] "Inductor 0603 0.8mmTall"
  rect 0.8x0.9 smd: 1(-0.9,0) 2(0.9,0)
  silkscreen extent -1.6,-0.7 1.6,0.7, body extent -0.8,-0.45 0.8,0.45, height 0.8
"LBGA256 16X16 1700X1700X155" [mm] "BGA, 256-Leads, Body 17.0x17.0mm,  Pitch 1.00mm"
  round 0.45 smd paste+0: A1(-7.5,7.5) A2(-6.5,7.5) A3(-5.5,7.5) A4(-4.5,7.5) A5(-3.5,7.5) A6(-2.5,7.5) A7(-1.5,7.5) A8(-0.5,7.5) A9(0.5,7.5) A10(1.5,7.5) A11(2.5,7.5) A12(3.5,7.5) A13(4.5,7.5) A14(5.5,7.5) A15(6.5,7.5) A16(7.5,7.5) B1(-7.5,6.5) B2(-6.5,6.5) B3(-5.5,6.5) B4(-4.5,6.5) B5(-3.5,6.5) B6(-2.5,6.5) B7(-1.5,6.5) B8(-0.5,6.5) B9(0.5,6.5) B10(1.5,6.5) B11(2.5,6.5) B12(3.5,6.5) B13(4.5,6.5) B14(5.5,6.5) B15(6.5,6.5) B16(7.5,6.5) C1(-7.5,5.5) C2(-6.5,5.5) C3(-5.5,5.5) C4(-4.5,5.5) C5(-3.5,5.5) C6(-2.5,5.5) C7(-1.5,5.5) C8(-0.5,5.5) C9(0.5,5.5) C10(1.5,5.5) C11(2.5,5.5) C12(3.5,5.5) C13(4.5,5.5) C14(5.5,5.5) C15(6.5,5.5) C16(7.5,5.5) D1(-7.5,4.5) D2(-6.5,4.5) D3(-5.5,4.5) D4(-4.5,4.5) D5(-3.5,4.5) D6(-2.5,4.5) D7(-1.5,4.5) D8(-0.5,4.5) D9(0.5,4.5) D10(1.5,4.5) D11(2.5,4.5) D12(3.5,4.5) D13(4.5,4.5) D14(5.5,4.5) D15(6.5,4.5) D16(7.5,4.5) E1(-7.5,3.5) E2(-6.5,3.5) E3(-5.5,3.5) E4(-4.5,3.5) E5(-3.5,3.5) E6(-2.5,3.5) E7(-1.5,3.5) E8(-0.5,3.5) E9(0.5,3.5) E10(1.5,3.5) E11(2.5,3.5) E12(3.5,3.5) E13(4.5,3.5) E14(5.5,3.5) E15(6.5,3.5) E16(7.5,3.5) F1(-7.5,2.5) F2(-6.5,2.5) F3(-5.5,2.5) F4(-4.5,2.5) F5(-3.5,2.5) F6(-2.5,2.5) F7(-1.5,2.5) F8(-0.5,2.5) F9(0.5,2.5) F10(1.5,2.5) F11(2.5,2.5) F12(3.5,2.5) F13(4.5,2.5) F14(5.5,2.5) F15(6.5,2.5) F16(7.5,2.5) G1(-7.5,1.5) G2(-6.5,1.5) G3(-5.5,1.5) G4(-4.5,1.5) G5(-3.5,1.5) G6(-2.5,1.5) G7(-1.5,1.5) G8(-0.5,1.5) G9(0.5,1.5) G10(1.5,1.5) G11(2.5,1.5) G12(3.5,1.5) G13(4.5,1.5) G14(5.5,1.5) G15(6.5,1.5) G16(7.5,1.5) H1(-7.5,0.5) H2(-6.5,0.5) H3(-5.5,0.5) H4(-4.5,0.5) H5(-3.5,0.5) H6(-2.5,0.5) H7(-1.5,0.5) H8(-0.5,0.5) H9(0.5,0.5) H10(1.5,0.5) H11(2.5,0.5) H12(3.5,0.5) H13(4.5,0.5) H14(5.5,0.5) H15(6.5,0.5) H16(7.5,0.5) J1(-7.5,-0.5) J2(-6.5,-0.5) J3(-5.5,-0.5) J4(-4.5,-0.5) J5(-3.5,-0.5) J6(-2.5,-0.5) J7(-1.5,-0.5) J8(-0.5,-0.5) J9(0.5,-0.5) J10(1.5,-0.5) J11(2.5,-0.5) J12(3.5,-0.5) J13(4.5,-0.5) J14(5.5,-0.5) J15(6.5,-0.5) J16(7.5,-0.5) K1(-7.5,-1.5) K2(-6.5,-1.5) K3(-5.5,-1.5) K4(-4.5,-1.5) K5(-3.5,-1.5) K6(-2.5,-1.5) K7(-1.5,-1.5) K8(-0.5,-1.5) K9(0.5,-1.5) K10(1.5,-1.5) K11(2.5,-1.5) K12(3.5,-1.5) K13(4.5,-1.5) K14(5.5,-1.5) K15(6.5,-1.5) K16(7.5,-1.5) L1(-7.5,-2.5) L2(-6.5,-2.5) L3(-5.5,-2.5) L4(-4.5,-2.5) L5(-3.5,-2.5) L6(-2.5,-2.5) L7(-1.5,-2.5) L8(-0.5,-2.5) L9(0.5,-2.5) L10(1.5,-2.5) L11(2.5,-2.5) L12(3.5,-2.5) L13(4.5,-2.5) L14(5.5,-2.5) L15(6.5,-2.5) L16(7.5,-2.5) M1(-7.5,-3.5) M2(-6.5,-3.5) M3(-5.5,-3.5) M4(-4.5,-3.5) M5(-3.5,-3.5) M6(-2.5,-3.5) M7(-1.5,-3.5) M8(-0.5,-3.5) M9(0.5,-3.5) M10(1.5,-3.5) M11(2.5,-3.5) M12(3.5,-3.5) M13(4.5,-3.5) M14(5.5,-3.5) M15(6.5,-3.5) M16(7.5,-3.5) N1(-7.5,-4.5) N2(-6.5,-4.5) N3(-5.5,-4.5) N4(-4.5,-4.5) N5(-3.5,-4.5) N6(-2.5,-4.5) N7(-1.5,-4.5) N8(-0.5,-4.5) N9(0.5,-4.5) N10(1.5,-4.5) N11(2.5,-4.5) N12(3.5,-4.5) N13(4.5,-4.5) N14(5.5,-4.5) N15(6.5,-4.5) N16(7.5,-4.5) P1(-7.5,-5.5) P2(-6.5,-5.5) P3(-5.5,-5.5) P4(-4.5,-5.5) P5(-3.5,-5.5) P6(-2.5,-5.5) P7(-1.5,-5.5) P8(-0.5,-5.5) P9(0.5,-5.5) P10(1.5,-5.5) P11(2.5,-5.5) P12(3.5,-5.5) P13(4.5,-5.5) P14(5.5,-5.5) P15(6.5,-5.5) P16(7.5,-5.5) R1(-7.5,-6.5) R2(-6.5,-6.5) R3(-5.5,-6.5) R4(-4.5,-6.5) R5(-3.5,-6.5) R6(-2.5,-6.5) R7(-1.5,-6.5) R8(-0.5,-6.5) R9(0.5,-6.5) R10(1.5,-6.5) R11(2.5,-6.5) R12(3.5,-6.5) R13(4.5,-6.5) R14(5.5,-6.5) R15(6.5,-6.5) R16(7.5,-6.5) T1(-7.5,-7.5) T2(-6.5,-7.5) T3(-5.5,-7.5) T4(-4.5,-7.5) T5(-3.5,-7.5) T6(-2.5,-7.5) T7(-1.5,-7.5) T8(-0.5,-7.5) T9(0.5,-7.5) T10(1.5,-7.5) T11(2.5,-7.5) T12(3.5,-7.5) T13(4.5,-7.5) T14(5.5,-7.5) T15(6.5,-7.5) T16(7.5,-7.5)
  silkscreen extent -9.27,-8.5 8.5,8.5, body extent -8.5,-8.5 8.5,8.5, height 1.7
MSOP-8E [mm] "8-Lead Plastic MSOP, Exposed Die Pad"
  oval 1.15x0.45 smd: 1(-2.175,0.975)
  rect 1.15x0.45 smd: 2(-2.175,0.325) 3(-2.175,-0.325) 4(-2.175,-0.975) 5(2.175,-0.975) 6(2.175,-0.325) 7(2.175,0.325) 8(2.175,0.975)
  rect 1.782x1.982 smd: 9(0,0)
  silkscreen extent -2.3,1.62 -2.05,1.87, body extent -2.47,-1.55 2.47,1.55, height 1.1
NPPN101BFCN-RC [mil] "10-pin 2mm Female Header"
  round 55 hole 31: 1(0,0) 2(78.74,0) 3(157.48,0) 4(236.22,0) 5(314.96,0) 6(393.7,0) 7(472.44,0) 8(551.18,0) 9(629.92,0) 10(708.66,0)
  silkscreen extent -50,-45 755,50, body extent -50,-47 757,47, height 174
"NPPN101BFCN-RC - 11-20" [mil] "10-pin 2mm Female Header"
  round 55 hole 31: 11(0,0) 12(78.74,0) 13(157.48,0) 14(236.22,0) 15(314.96,0) 16(393.7,0) 17(472.44,0) 18(551.18,0) 19(629.92,0) 20(708.66,0)
  silkscreen extent -50,-45 755,50, body extent -50,-47 757,47, height 174
PEC11R-4215K-S0024 [mm] "Rotary mechanical Encoder"
  round 1.8 hole 1: 1(-2.5,7) 2(2.5,7) A(-2.5,-7.5) B(2.5,-7.5) C(0,-7.5)
  oval 2.5x5.08 hole 1.6 slot 3 at 90 deg: M1(-6.147,0) M2(6.147,0)
  silkscreen extent -7,-7.7 7,7.2, body extent -7,-7.7 7,7.2, height 21.61
R0603_0.55MM_HD [mm] "Resistor 0603 High Density"
  rect 0.5x0.75 smd: 1(-0.725,0) 2(0.725,0)
  silkscreen extent -0.1,-0.28 0.1,0.28, body extent -0.8,-0.4 0.8,0.4, height 0.55
R0603_0.55MM_MD [mm] "Resistor 0603 Medium Density"
  rect 0.7x0.85 smd: 1(-0.825,0) 2(0.825,0)
  silkscreen extent -0.1,-0.33 0.1,0.33, body extent -0.8,-0.4 0.8,0.4, height 0.55
R1206_0.60MM_HD [mm] "Resistor 1206 High Density"
  rect 0.75x1.7 smd: 1(-1.475,0) 2(1.475,0)
  silkscreen extent -0.7,-0.75 0.7,0.75, body extent -1.7,-0.9 1.7,0.9, height 0.6
R1206_0.70MM_HD [mm] "Resistor 1206 High Density"
  rect 0.7x1.55 smd: 1(-1.425,0) 2(1.425,0)
  silkscreen extent -0.7,-0.68 0.7,0.67, body extent -1.6,-0.8 1.6,0.8, height 0.7
SMT_TEST_5015 [mil] "SMT_TEST"
  rect 105x43 smd: 1(0,0)
  body extent -52,-20 52,20, height 60
SOD-323 [mm] "SOD323 Diode"
  rect 0.86x0.54 smd paste-0.05: 1(-1.07,0) 2(1.07,0)
  silkscreen extent -0.88,-0.68 1.87,0.65, body extent -1.3,-0.67 1.3,0.68, height 1.1
SOIC-8 [mm] "SOIC, 8-Leads, Body 5.0x4.0mm (max), Pitch 1.27mm, IPC Medium Density"
  rrect50% 2.2x0.6 smd: 1(-2.4,1.905)
  rect 2.2x0.6 smd: 2(-2.4,0.635) 3(-2.4,-0.635) 4(-2.4,-1.905) 5(2.4,-1.905) 6(2.4,-0.635) 7(2.4,0.635) 8(2.4,1.905)
  silkscreen extent -2.52,-2.5 2,2.88, body extent -3.01,-2.5 3,2.5, height 1.75
SOIC-8W [mm] "SOIC8 208mil Wide Body"
  oval 2.1x0.6 smd: 1(-3.75,1.905)
  rect 2.1x0.6 smd: 2(-3.75,0.635) 3(-3.75,-0.635) 4(-3.75,-1.905) 5(3.75,-1.905) 6(3.75,-0.635) 7(3.75,0.635) 8(3.75,1.905)
  silkscreen extent -3.87,-2.63 2.3,2.88, body extent -4,-2.63 4,2.63, height 2.58
SOIC-20-300_MEDIUM [mm] "SOIC-20 0.300 inch wide"
  oval 2.3x0.6 smd: 1(-4.55,5.715)
  rect 2.3x0.6 smd: 2(-4.55,4.445) 3(-4.55,3.175) 4(-4.55,1.905) 5(-4.55,0.635) 6(-4.55,-0.635) 7(-4.55,-1.905) 8(-4.55,-3.175) 9(-4.55,-4.445) 10(-4.55,-5.715) 11(4.55,-5.715) 12(4.55,-4.445) 13(4.55,-3.175) 14(4.55,-1.905) 15(4.55,-0.635) 16(4.55,0.635) 17(4.55,1.905) 18(4.55,3.175) 19(4.55,4.445) 20(4.55,5.715)
  silkscreen extent -4.67,-6.5 3,6.69, body extent -5.3,-6.5 5.3,6.5, height 2.57
SOT23-5 [mm] "SOT23, 5-Leads, Body 3.1x2.6mm (max), Pitch 0.95mm, IPC High Density"
  rect 0.85x0.6 smd: 1(-1.125,0.95) 2(-1.125,0) 3(-1.125,-0.95) 4(1.125,-0.95) 5(1.125,0.95)
  silkscreen extent -1.15,-1.5 0.5,1.93, body extent -1.38,-1.45 1.32,1.45, height 1.15
SOT23_MEDIUM [mm] "SOT23, 3-Leads, Body 2.90x2.30mm, Pitch 0.95mm, IPC Medium Density"
  rect 1.4x0.55 smd: 1(-0.95,0.95) 2(-0.95,-0.95) 3(0.95,0)
  silkscreen extent -1.07,-1.5 0.7,1.9, body extent -1.21,-1.45 1.21,1.45, height 0.98
SOT23_Medium [mm] "SOT23, 3-Leads, Body 2.90x2.30mm, Pitch 0.95mm, IPC Medium Density"
  rect 1.4x0.55 smd: 1(-0.95,0.95) 2(-0.95,-0.95) 3(0.95,0)
  silkscreen extent -1.08,-1.5 0.7,1.9, body extent -1.21,-1.45 1.21,1.45, height 0.98
SOT95P245X145-6L [mm] "SOT23, 6-Leads, Body 3.1x2.6mm (max), Pitch 0.95mm, IPC High Density"
  rect 0.85x0.6 smd: 1(-1.225,0.95) 2(-1.225,0) 3(-1.225,-0.95) 4(1.225,-0.95) 5(1.225,0) 6(1.225,0.95)
  silkscreen extent -1.15,-1.5 0.5,1.92, body extent -1.5,-1.5 1.5,1.5, height 1.3
SOT143B [mm] "SOT143B"
  rect 1.1x0.8 smd: 1(0,0)
  rect 0.6x0.7 smd: 2(1.702,0) 3(1.702,1.9) 4(-0.2,1.9)
  silkscreen extent -0.71,0.43 2.21,1.52, body extent -0.7,-0.27 2.22,2.15, height 1
SOT223 [mm] "SOT223, 4-Leads, Body 6.7x7.3mm (max), Pitch 2.30mm, IPC High Density"
  rect 2.1x0.9 smd: 1(-2.85,2.3) 2(-2.85,0) 3(-2.85,-2.3)
  rect 2.1x3.3 smd: 4(2.85,0)
  silkscreen extent -2.97,-3.35 1.4,3.42, body extent -3.54,-3.35 3.76,3.35, height 1.75
SOT427_MEDIUM [mm] "SOT427 (SC-74), 6-Leads, Body 3.1x3.0mm (max), Pitch 0.95mm, IPC Medium Density"
  rect 1.15x0.6 smd: 1(-1.175,0.95) 2(-1.175,0) 3(-1.175,-0.95) 4(1.175,-0.95) 5(1.175,0) 6(1.175,0.95)
  silkscreen extent -1.3,-1.55 0.2,1.92, body extent -0.85,-1.55 0.85,1.55, height 1.1
SOT-23 [mm] "SOT-23"
  rect 1.2x0.6 smd: 1(-0.9,0.95) 2(-0.9,-0.95) 3(0.9,0)
  silkscreen extent -1.02,-1.55 0.87,1.93, body extent -1.27,-1.5 1.23,1.5, height 1.07
T_Laird_35F0121-0SR-10 [mm] "Power supply FB 10A"
  rect 2.77x1.47 smd: 1(-1.79,0) 2(1.79,0)
  silkscreen extent -2.73,-1.6 2.73,1.6, body extent -2.54,-1.53 2.54,1.53, height 3.05
TC2030 [mil] "TC2030-MCP"
  round 31 smd paste-40: 1(110,135) 2(110,185) 3(160,135) 4(160,185) 5(210,135) 6(210,185)
  round 34 hole 35 unplated: A(60,160) B(260,200) C(260,120)
  round 92 hole 93 unplated: D(60,60) E(185,60) F(60,260) G(185,260)
  silkscreen extent 5,5 285,315
TC2070 [mil] "TC2070 14-PIN TAG-CONNECT WITH LEGS"
  round 10 hole 95 unplated mask+45: 0(-200,-100) 0(-200,100) 0(125,-100) 0(125,100)
  round 10 hole 39 unplated mask+18: 0(-200,0) 0(200,-40) 0(200,40)
  round 29 smd paste-40: 1(-150,-25) 2(-100,-25) 3(-50,-25) 4(0,-25) 5(50,-25) 6(100,-25) 7(150,-25) 8(150,25) 9(100,25) 10(50,25) 11(0,25) 12(-50,25) 13(-100,25) 14(-150,25)
  Top Layer keep-out lines w5: 165,0 -165,0
  Bottom Layer keep-out lines w8: 155,-155 155,-215 125,-215 95,-215 95,-155 ; 155,155 155,215 125,215 95,215 95,155 ; -170,-155 -170,-215 -200,-215 -230,-215 -230,-155 ; -170,155 -170,215 -200,215 -230,215 -230,155
  silkscreen extent -260,-160 250,160
TFBGA90_8x13 [mm] "TF-BGA, 90-Leads, Body 8.00x13.00mmx1.20mm, Pitch 0.80mm"
  round 0.4 smd: A1(-3.2,5.6) A2(-2.4,5.6) A3(-1.6,5.6) A7(1.6,5.6) A8(2.4,5.6) A9(3.2,5.6) B1(-3.2,4.8) B2(-2.4,4.8) B3(-1.6,4.8) B7(1.6,4.8) B8(2.4,4.8) B9(3.2,4.8) C1(-3.2,4) C2(-2.4,4) C3(-1.6,4) C7(1.6,4) C8(2.4,4) C9(3.2,4) D1(-3.2,3.2) D2(-2.4,3.2) D3(-1.6,3.2) D7(1.6,3.2) D8(2.4,3.2) D9(3.2,3.2) E1(-3.2,2.4) E2(-2.4,2.4) E3(-1.6,2.4) E7(1.6,2.4) E8(2.4,2.4) E9(3.2,2.4) F1(-3.2,1.6) F2(-2.4,1.6) F3(-1.6,1.6) F7(1.6,1.6) F8(2.4,1.6) F9(3.2,1.6) G1(-3.2,0.8) G2(-2.4,0.8) G3(-1.6,0.8) G7(1.6,0.8) G8(2.4,0.8) G9(3.2,0.8) H1(-3.2,0) H2(-2.4,0) H3(-1.6,0) H7(1.6,0) H8(2.4,0) H9(3.2,0) J1(-3.2,-0.8) J2(-2.4,-0.8) J3(-1.6,-0.8) J7(1.6,-0.8) J8(2.4,-0.8) J9(3.2,-0.8) K1(-3.2,-1.6) K2(-2.4,-1.6) K3(-1.6,-1.6) K7(1.6,-1.6) K8(2.4,-1.6) K9(3.2,-1.6) L1(-3.2,-2.4) L2(-2.4,-2.4) L3(-1.6,-2.4) L7(1.6,-2.4) L8(2.4,-2.4) L9(3.2,-2.4) M1(-3.2,-3.2) M2(-2.4,-3.2) M3(-1.6,-3.2) M7(1.6,-3.2) M8(2.4,-3.2) M9(3.2,-3.2) N1(-3.2,-4) N2(-2.4,-4) N3(-1.6,-4) N7(1.6,-4) N8(2.4,-4) N9(3.2,-4) P1(-3.2,-4.8) P2(-2.4,-4.8) P3(-1.6,-4.8) P7(1.6,-4.8) P8(2.4,-4.8) P9(3.2,-4.8) R1(-3.2,-5.6) R2(-2.4,-5.6) R3(-1.6,-5.6) R7(1.6,-5.6) R8(2.4,-5.6) R9(3.2,-5.6)
  silkscreen extent -4.77,-6.5 4,6.5, body extent -4,-6.5 4,6.5, height 0.96
TI_DGN_MD [mm] "HVSSOP, 8-Leads, Body 3.00x3.00mm, Pitch 0.65mm, Thermal Pad 1.89x1.57mm, IPC Medium Density"
  rect 1.35x0.4 smd: 1(-2.225,0.975) 2(-2.225,0.325) 3(-2.225,-0.325) 4(-2.225,-0.975) 5(2.225,-0.975) 6(2.225,-0.325) 7(2.225,0.325) 8(2.225,0.975)
  rect 1.57x1.89 smd: 9(0,0)
  silkscreen extent -2.35,-1.55 1.15,1.9, body extent -2.45,-1.55 2.45,1.55, height 1.1
TP_SMT_25_MIL_ROUND [mil]
  round 25 smd paste-25: 1(0,0)
TSOT-23-5 [mm] "SOT23, 5-Leads, Body 3.0x2.9mm (max), Pitch 0.95mm, IPC Medium Density"
  rect 1.2x0.55 smd: 1(-1.31,0.95) 2(-1.31,0) 3(-1.3,-0.95) 4(1.31,-0.95) 5(1.3,0.95)
  silkscreen extent -1.45,-1.5 0.7,1.82, body extent -1.57,-1.49 1.63,1.41, height 0.94
XBEE3_CELLULAR_PLACEMENT_GUIDE [mil] "Placement guide for the XBEE3 cell module"
"XF2M-6015-1AH - Reverse" [mm] "FFC Connector 0.5mm pitch for bottom LCD feedthrough"
  rect 0.3x1.1 smd: 1(14.75,-1.95) 2(14.25,-1.95) 3(13.75,-1.95) 4(13.25,-1.95) 5(12.75,-1.95) 6(12.25,-1.95) 7(11.75,-1.95) 8(11.25,-1.95) 9(10.75,-1.95) 10(10.25,-1.95) 11(9.75,-1.95) 12(9.25,-1.95) 13(8.75,-1.95) 14(8.25,-1.95) 15(7.75,-1.95) 16(7.25,-1.95) 17(6.75,-1.95) 18(6.25,-1.95) 19(5.75,-1.95) 20(5.25,-1.95) 21(4.75,-1.95) 22(4.25,-1.95) 23(3.75,-1.95) 24(3.25,-1.95) 25(2.75,-1.95) 26(2.25,-1.95) 27(1.75,-1.95) 28(1.25,-1.95) 29(0.75,-1.95) 30(0.25,-1.95) 31(-0.25,-1.95) 32(-0.75,-1.95) 33(-1.25,-1.95) 34(-1.75,-1.95) 35(-2.25,-1.95) 36(-2.75,-1.95) 37(-3.25,-1.95) 38(-3.75,-1.95) 39(-4.25,-1.95) 40(-4.75,-1.95) 41(-5.25,-1.95) 42(-5.75,-1.95) 43(-6.25,-1.95) 44(-6.75,-1.95) 45(-7.25,-1.95) 46(-7.75,-1.95) 47(-8.25,-1.95) 48(-8.75,-1.95) 49(-9.25,-1.95) 50(-9.75,-1.95) 51(-10.25,-1.95) 52(-10.75,-1.95) 53(-11.25,-1.95) 54(-11.75,-1.95) 55(-12.25,-1.95) 56(-12.75,-1.95) 57(-13.25,-1.95) 58(-13.75,-1.95) 59(-14.25,-1.95) 60(-14.75,-1.95)
  rect 1.7x1.5 smd: ""(-16.45,1.95) ""(16.45,1.95)
  silkscreen extent -17.05,-4.02 17.05,2.93, body extent -17.05,-3.27 17.05,2.93, height 2.1